# Allegro board ADU_TEST.brd
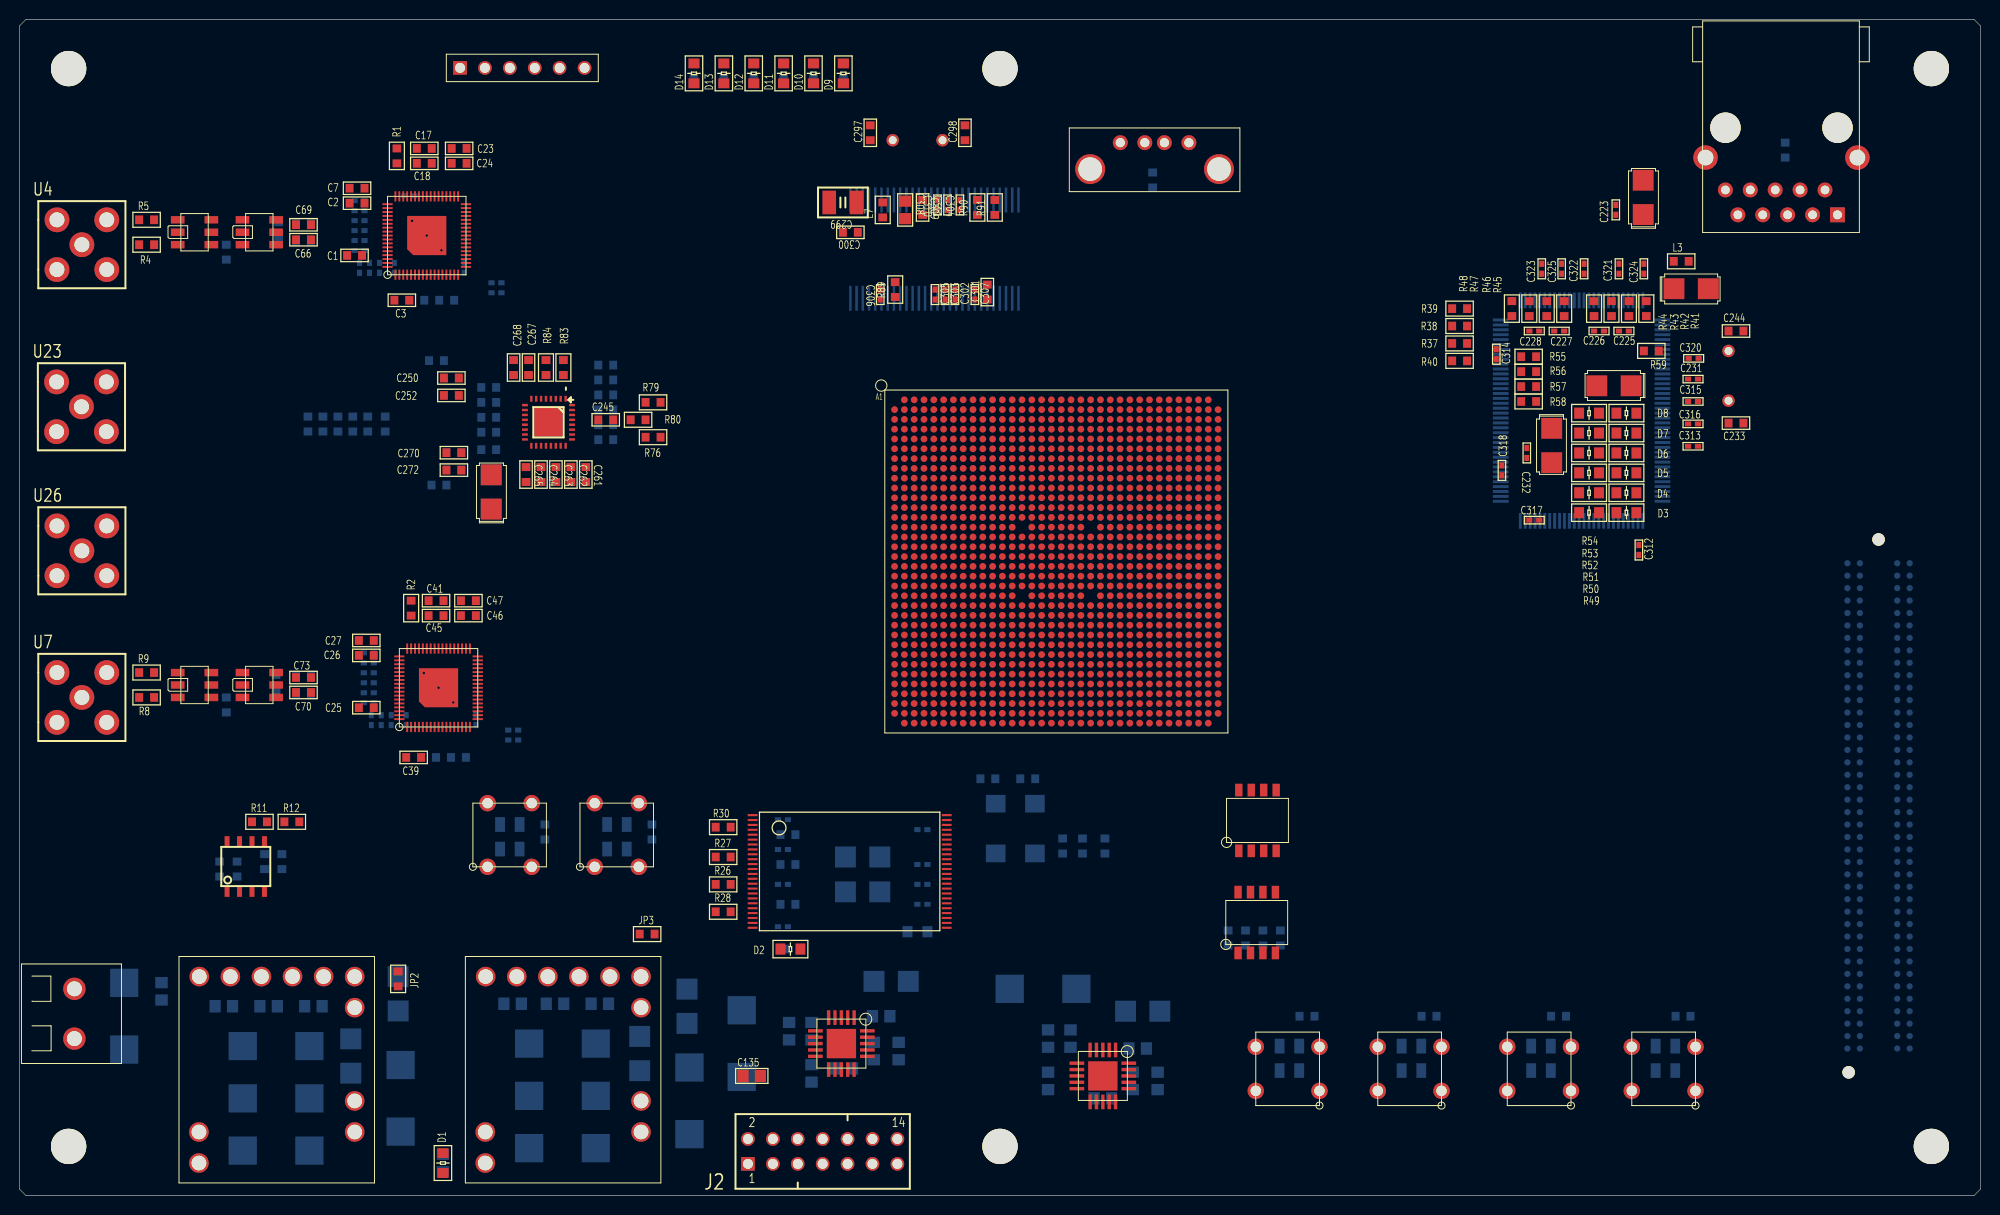
[diagram p0: board, top side]
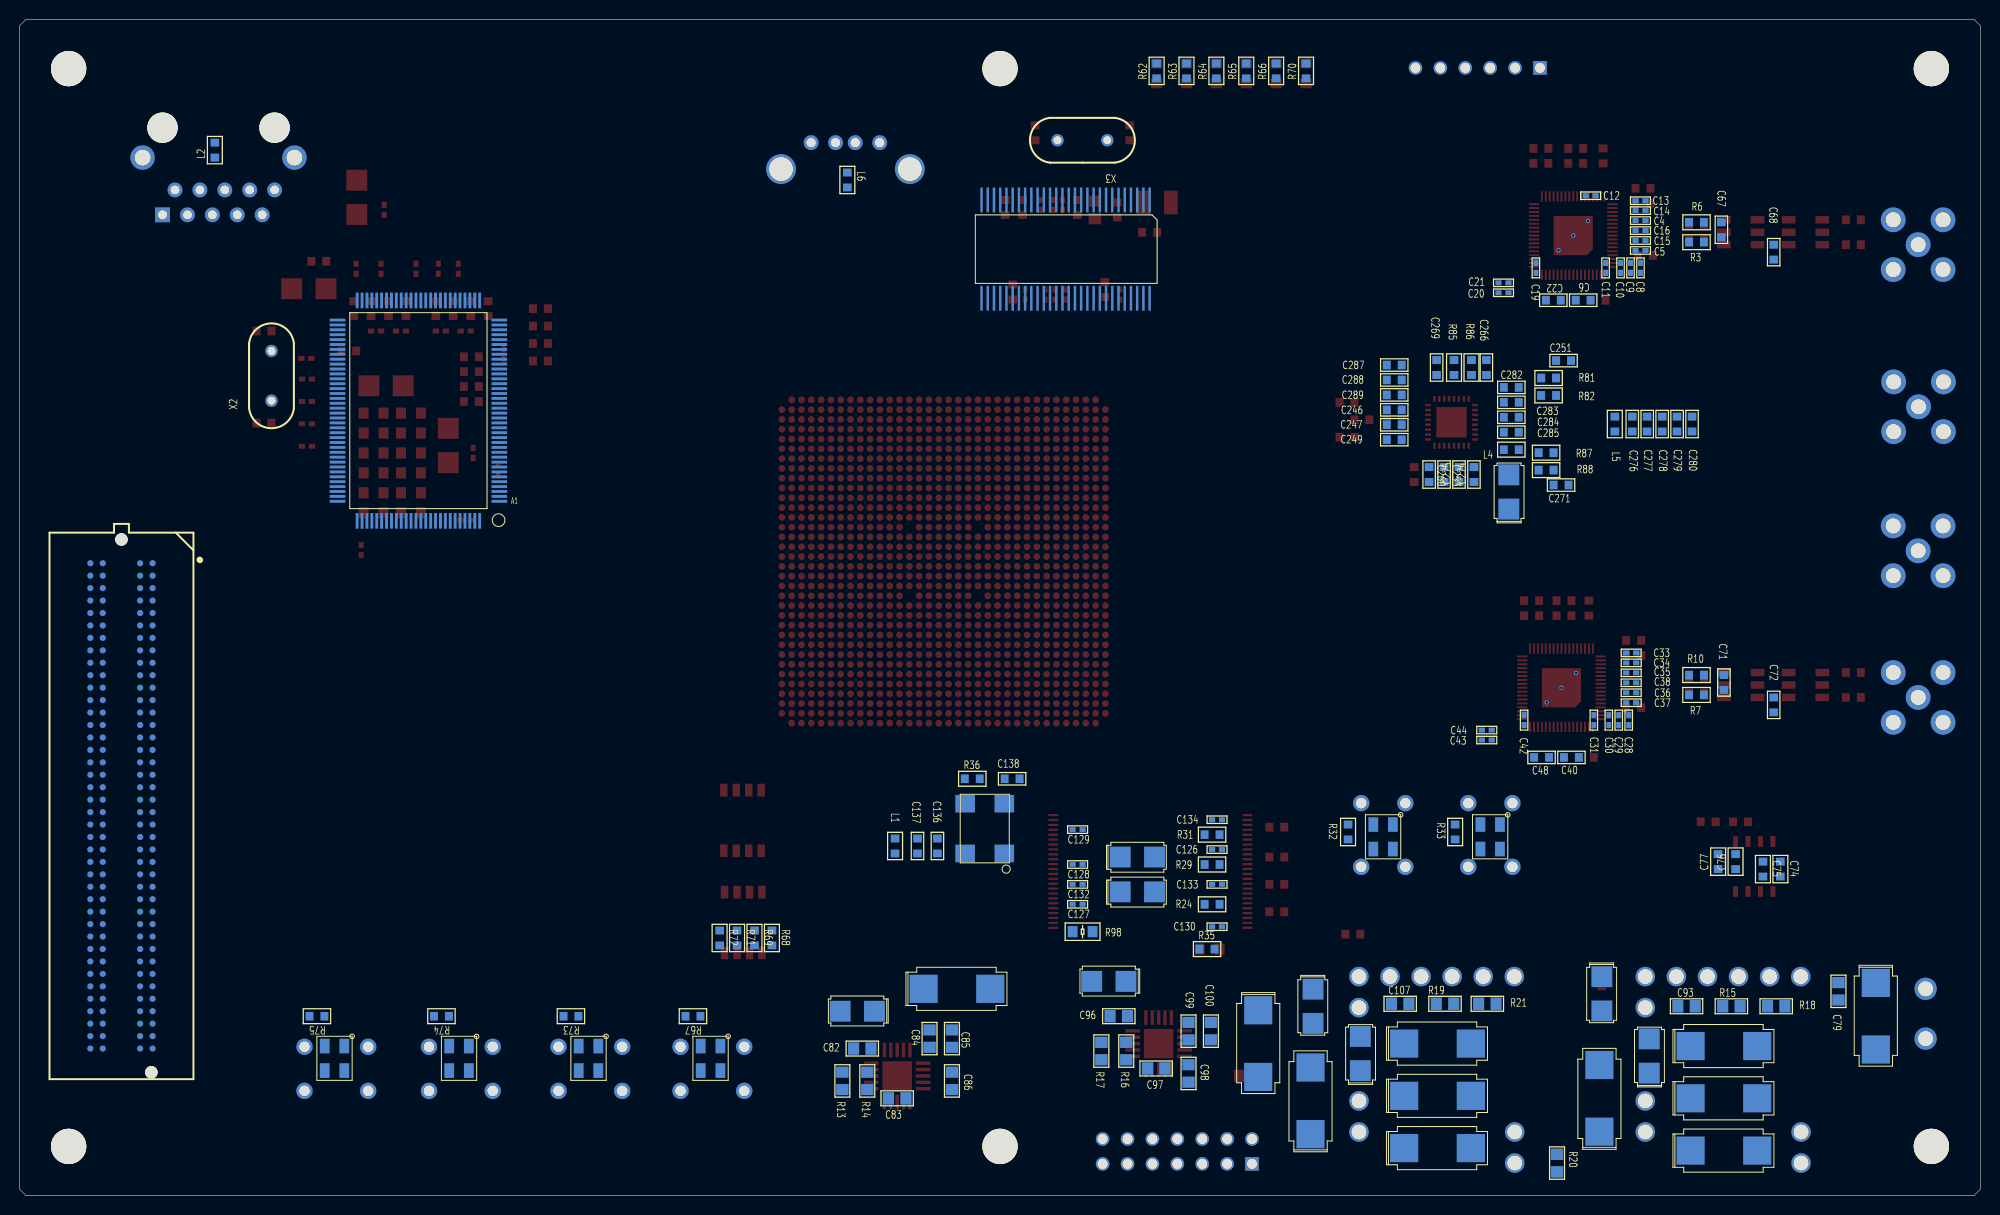
[diagram p1: board, bottom side, seen from below]

Outline 200 x 120 mm; copper layers: TOP, 2-PWR1, 3-GND1, 4-S1, 5-S2, 6-GND2, 7-S3, 8-S4, 9-GND3, 10-PWR2, 11-S5, BOTTOM. Coordinates in mm from the lower left corner of the outline.

## Design rules (mm)
net group ADC1_CLKIN: nets ADC1_CLKIN_N ADC1_CLKIN_P
net group ADC1_D0: nets ADC1_D0N ADC1_D0P
net group ADC1_D1: nets ADC1_D1N ADC1_D1P
net group ADC1_D2: nets ADC1_D2N ADC1_D2P
net group ADC1_D3: nets ADC1_D3N ADC1_D3P
net group ADC1_D4: nets ADC1_D4N ADC1_D4P
net group ADC1_D5: nets ADC1_D5N ADC1_D5P
net group ADC1_D6: nets ADC1_D6N ADC1_D6P
net group ADC1_D7: nets ADC1_D7N ADC1_D7P
net group ADC1_D8: nets ADC1_D8N ADC1_D8P
net group ADC1_D9: nets ADC1_D9N ADC1_D9P
net group ADC1_D10: nets ADC1_D10N ADC1_D10P
net group ADC1_D11: nets ADC1_D11N ADC1_D11P
net group ADC1_D12: nets ADC1_D12N ADC1_D12P
net group ADC1_D13: nets ADC1_D13N ADC1_D13P
net group ADC1_DCLK: nets ADC1_DCLKN ADC1_DCLKP
net group ADC1_IN: nets ADC1_INN ADC1_INP
net group ADC2_CLKIN: nets ADC2_CLKIN_N ADC2_CLKIN_P
net group ADC2_D0: nets ADC2_D0N ADC2_D0P
net group ADC2_D1: nets ADC2_D1N ADC2_D1P
net group ADC2_D2: nets ADC2_D2N ADC2_D2P
net group ADC2_D3: nets ADC2_D3N ADC2_D3P
net group ADC2_D4: nets ADC2_D4N ADC2_D4P
net group ADC2_D5: nets ADC2_D5N ADC2_D5P
net group ADC2_D6: nets ADC2_D6N ADC2_D6P
net group ADC2_D7: nets ADC2_D7N ADC2_D7P
net group ADC2_D8: nets ADC2_D8N ADC2_D8P
net group ADC2_D9: nets ADC2_D9N ADC2_D9P
net group ADC2_D10: nets ADC2_D10N ADC2_D10P
net group ADC2_D11: nets ADC2_D11N ADC2_D11P
net group ADC2_D12: nets ADC2_D12N ADC2_D12P
net group ADC2_D13: nets ADC2_D13N ADC2_D13P
net group ADC2_DCLK: nets ADC2_DCLKN ADC2_DCLKP
net group ADC2_IN: nets ADC2_INN ADC2_INP
net group CLK0_M2C: nets CLK0_M2C_N CLK0_M2C_P
net group CLK1_M2C: nets CLK1_M2C_N CLK1_M2C_P
net group DP0_C2M: nets DP0_C2M_N DP0_C2M_P
net group DP0_M2C: nets DP0_M2C_N DP0_M2C_P
net group GB_TCLK_M2C: nets GB_TCLK_M2C_N GB_TCLK_M2C_P
net group LA00_CC: nets LA00_CC_N LA00_CC_P
net group LA01_CC: nets LA01_CC_N LA01_CC_P
net group LA02: nets LA02_N LA02_P
net group LA03: nets LA03_N LA03_P
net group LA04: nets LA04_N LA04_P
net group LA05: nets LA05_N LA05_P
net group LA06: nets LA06_N LA06_P
net group LA07: nets LA07_N LA07_P
net group LA08: nets LA08_N LA08_P
net group LA09: nets LA09_N LA09_P
net group LA10: nets LA10_N LA10_P
net group LA11: nets LA11_N LA11_P
net group LA12: nets LA12_N LA12_P
net group LA13: nets LA13_N LA13_P
net group LA14: nets LA14_N LA14_P
net group LA15: nets LA15_N LA15_P
net group LA16: nets LA16_N LA16_P
net group LA17_CC: nets LA17_CC_N LA17_CC_P
net group LA18_CC: nets LA18_CC_N LA18_CC_P
net group LA19: nets LA19_N LA19_P
net group LA20: nets LA20_N LA20_P
net group LA21: nets LA21_N LA21_P
net group LA22: nets LA22_N LA22_P
net group LA23: nets LA23_N LA23_P
net group LA24: nets LA24_N LA24_P
net group LA25: nets LA25_N LA25_P
net group LA26: nets LA26_N LA26_P
net group LA27: nets LA27_N LA27_P
net group LA28: nets LA28_N LA28_P
net group LA29: nets LA29_N LA29_P
net group LA30: nets LA30_N LA30_P
net group LA31: nets LA31_N LA31_P
net group LA32: nets LA32_N LA32_P
net group LA33: nets LA33_N LA33_P
net group MDI0: nets MDI0_N MDI0_P
net group MDI1: nets MDI1_N MDI1_P
net group MDI2: nets MDI2_N MDI2_P
net group MDI3: nets MDI3_N MDI3_P
net group USB_D: nets USB_DN USB_DP
net group USB_XTAL: nets USB_XTALN USB_XTALP

## Placement (name value [footprint] x y rotation side)
C1  0.1U  [SC0603]  34.16 95.93 0 top
C2  0.01U  [SC0603]  34.42 101.26 0 top
C3  DNP  [SC0603]  38.99 91.36 180 top
C4  0.01U  [SC0402]  34.67 99.49 0 bottom
C5  0.01U  [SC0402]  34.67 96.44 0 bottom
C6  0.1U  [SC0603]  40.51 91.36 180 bottom
C7  0.1U  [SC0603]  34.42 102.79 0 top
C8  0.1U  [SC0402]  34.67 94.66 90 bottom
C9  0.01U  [SC0402]  35.69 94.66 90 bottom
C10  0.01U  [SC0402]  36.7 94.66 90 bottom
C11  10U  [SC0402]  38.23 94.66 270 bottom
C12  0.1U  [SC0402]  39.75 102.03 0 bottom
C13  0.01U  [SC0402]  34.67 101.52 0 bottom
C14  0.01U  [SC0402]  34.67 100.5 0 bottom
C15  0.01U  [SC0402]  34.67 97.45 0 bottom
C16  10U  [SC0402]  34.67 98.47 0 bottom
C17  0.01U  [SC0603]  41.28 106.85 180 top
C18  0.1U  [SC0603]  41.28 105.33 180 top
C19  0.1U  [SC0402]  45.34 94.66 90 bottom
C20  0.01U  [SC0402]  48.64 92.12 180 bottom
C21  0.01U  [SC0402]  48.64 93.14 180 bottom
C22  0.01U  [SC0603]  43.56 91.36 0 bottom
C23  0.1U  [SC0603]  44.83 106.85 0 top
C24  0.1U  [SC0603]  44.83 105.33 0 top
C25  0.1U  [SC0603]  35.36 49.78 0 top
C26  0.1U  [SC0603]  35.36 55.11 0 top
C27  0.01U  [SC0603]  35.36 56.63 0 top
C28  0.1U  [SC0402]  35.87 48.51 270 bottom
C29  0.01U  [SC0402]  36.89 48.51 270 bottom
C30  0.01U  [SC0402]  37.9 48.51 270 bottom
C31  10U  [SC0402]  39.43 48.51 270 bottom
C33  0.01U  [SC0402]  35.62 55.36 0 bottom
C34  0.01U  [SC0402]  35.62 54.35 0 bottom
C35  0.01U  [SC0402]  35.62 53.33 0 bottom
C36  0.01U  [SC0402]  35.62 51.3 0 bottom
C37  0.01U  [SC0402]  35.62 50.28 0 bottom
C38  10U  [SC0402]  35.62 52.32 0 bottom
C39  DNP  [SC0603]  40.19 44.7 180 top
C40  0.1U  [SC0603]  41.71 44.7 180 bottom
C41  0.01U  [SC0603]  42.48 60.7 180 top
C42  0.1U  [SC0402]  46.54 48.51 90 bottom
C43  0.01U  [SC0402]  50.35 46.47 180 bottom
C44  0.01U  [SC0402]  50.35 47.49 180 bottom
C45  0.1U  [SC0603]  42.48 59.17 180 top
C46  0.01U  [SC0603]  45.78 59.17 0 top
C47  0.1U  [SC0603]  45.78 60.7 0 top
C48  0.1U  [SC0603]  44.76 44.7 0 bottom
C66  1u  [SC0603]  28.96 97.54 0 top
C67  0.1u  [SC0603]  26.42 98.55 90 bottom
C68  0.1u  [SC0603]  21.08 96.27 270 bottom
C69  1u  [SC0603]  28.96 99.06 0 top
C70  1u  [SC0603]  28.96 51.33 0 top
C71  0.1u  [SC0603]  26.16 52.35 90 bottom
C72  0.1u  [SC0603]  21.08 50.06 270 bottom
C73  1u  [SC0603]  28.96 52.85 0 top
C74  10U  [SR0603]  20.4 33.3 270 bottom
C75  0.1U  [SR0603]  22.18 33.3 270 bottom
C76  1U  [SR0603]  24.97 34.06 90 bottom
C77  0.1U  [SR0603]  26.75 34.06 90 bottom
C78  1000u  [SC7343]  10.67 18.29 270 bottom
C79  0.1u  [SC0805]  14.48 20.83 90 bottom
C80  100u_NC  [SC7343]  104.39 21.08 180 bottom
C81  10u  [SC3528]  114.55 18.8 0 bottom
C82  0.1u  [SC0805]  114.05 14.99 180 bottom
C83  10n  [SC0805]  110.49 9.91 0 bottom
C84  1u  [SC0805]  107.19 16 270 bottom
C85  0.1u  [SC0805]  104.9 16 270 bottom
C86  0.1u  [SC0805]  104.9 11.68 90 bottom
C87  22u  [SC3528]  33.78 14.22 90 bottom
C88  470u_NC  [SC7343]  26.16 4.57 180 bottom
C89  330u  [SC7343]  38.86 9.91 90 bottom
C90  1000u_NC  [SC7343]  26.16 15.24 180 bottom
C91  470u  [SC7343]  26.16 9.91 180 bottom
C92  10u  [SC3528]  38.61 20.57 270 bottom
C93  0.1u  [SC0805]  29.97 19.3 0 bottom
C94  100u_NC  [SC7343]  73.66 15.49 270 bottom
C95  10u  [SC3528]  88.9 21.84 0 bottom
C96  0.1u  [SC0805]  87.88 18.29 180 bottom
C97  10n  [SC0805]  84.07 12.95 0 bottom
C98  0.1u  [SC0805]  80.77 12.45 90 bottom
C99  1u  [SC0805]  80.77 16.76 270 bottom
C100  0.1u  [SC0805]  78.49 16.76 270 bottom
C101  22u  [SC3528]  63.25 14.48 90 bottom
C102  470u_NC  [SC7343]  55.37 4.83 180 bottom
C103  330u  [SC7343]  68.33 9.65 90 bottom
C104  1000u_NC  [SC7343]  55.37 15.49 180 bottom
C105  470u  [SC7343]  55.37 10.16 180 bottom
C106  10u  [SC3528]  68.07 19.3 270 bottom
C107  0.1u  [SC0805]  59.18 19.56 0 bottom
C125  10u  [SC3528]  85.99 34.54 180 bottom
C126  0.1u  [SC0402]  77.86 35.3 0 bottom
C127  0.1u  [SC0402]  92.08 29.71 180 bottom
C128  0.1u  [SC0402]  92.08 33.77 180 bottom
C129  0.1u  [SC0402]  92.08 37.33 180 bottom
C130  0.1u  [SC0402]  77.86 27.42 0 bottom
C131  10u  [SC3528]  85.99 30.98 180 bottom
C132  0.1u  [SC0402]  92.08 31.74 180 bottom
C133  0.1u  [SC0402]  77.86 31.74 0 bottom
C134  0.1u  [SC0402]  77.86 38.35 0 bottom
C135  1u  [SC0805]  74.68 12.19 180 top
C136  0.1u  [SC0603]  106.38 35.66 90 bottom
C137  1u  [SC0603]  108.42 35.66 90 bottom
C138  33p  [SC0603]  98.76 42.52 180 bottom
C223  10n  [SC0402]  162.81 100.58 90 top
C224  10u  [SC3528]  165.61 101.85 90 top
C225  10n  [SC0402]  163.64 88.22 180 top
C226  10n  [SC0402]  161.1 88.22 0 top
C227  10n  [SC0402]  157.04 88.22 180 top
C228  10n  [SC0402]  154.5 88.22 0 top
C229  10u  [SC3528]  170.5 92.54 0 top
C230  10u  [SC3528]  156.28 76.53 270 top
C231  0.1u  [SC0402]  170.69 83.31 0 top
C232  0.1u  [SC0402]  153.74 75.77 270 top
C233  22p  [SC0603]  175.07 78.82 180 top
C244  22p  [SC0603]  175.07 88.22 180 top
C245  0.1U  [SC0603]  59.78 79.16 180 top
C246  100p  [SC0603]  59.78 80.17 0 bottom
C247  100p  [SC0603]  59.78 78.65 180 bottom
C249  DNP  [SC0603]  59.78 77.13 0 bottom
C250  100p  [SC0603]  44.04 83.42 0 top
C251  100p  [SC0603]  42.52 85.2 0 bottom
C252  100p  [SC0603]  44.04 81.64 0 top
C253  10U  [SC0603]  54.7 73.57 270 bottom
C260  22U  [SC0603]  56.23 73.57 270 bottom
C261  10U  [SC0603]  57.75 73.57 270 top
C262  22U  [SC0603]  56.23 73.57 270 top
C263  2.2U  [SC0603]  54.7 73.57 270 top
C264  3.3n  [SC0603]  53.18 73.57 270 top
C265  2.2U  [SC0603]  51.66 73.57 270 top
C266  39p  [SC0603]  50.39 84.49 90 bottom
C267  3.9n  [SC0603]  51.91 84.49 90 top
C268  100p  [SC0603]  50.39 84.49 270 top
C269  4.7p  [SC0603]  55.47 84.49 90 bottom
C270  100p  [SC0603]  44.3 75.8 0 top
C271  100p  [SC0603]  42.77 72.5 0 bottom
C272  100p  [SC0603]  44.3 74.02 0 top
C274  100p  [SC0603]  51.66 73.57 90 bottom
C275  100p  [SC0603]  53.18 73.57 90 bottom
C276  0.1U  [SC0603]  35.51 78.72 90 bottom
C277  0.01U  [SC0603]  33.99 78.72 90 bottom
C278  1U  [SC0603]  32.46 78.72 90 bottom
C279  10U  [SC0603]  30.94 78.72 90 bottom
C280  0.1U  [SC0603]  29.41 78.72 90 bottom
C281  10u  [SC3528]  48.1 71.79 90 bottom
C282  0.1U  [SC0603]  47.85 82.46 180 bottom
C283  0.01U  [SC0603]  47.85 80.94 180 bottom
C284  100p  [SC0603]  47.85 79.41 180 bottom
C285  0.1U  [SC0603]  47.85 77.89 180 bottom
C286  10u  [SC3528]  48.1 71.79 90 top
C287  1U  [SC0603]  59.78 84.75 180 bottom
C288  0.1U  [SC0603]  59.78 83.22 180 bottom
C289  0.01U  [SC0603]  59.78 81.7 180 bottom
C297  12p  [SC0603]  86.77 108.45 90 top
C298  12p  [SC0603]  96.42 108.45 90 top
C299  47U  [SC1210]  83.98 101.34 180 top
C300  1u  [SC0603]  84.74 98.29 180 top
C301  1u  [SC0603]  98.71 92.19 90 top
C302  0.1u  [SC0402]  95.41 91.94 90 top
C303  0.1u  [SC0402]  94.39 91.94 90 top
C304  0.1u  [SC0402]  95.91 101.08 270 top
C305  0.1u  [SC0402]  93.37 91.94 90 top
C306  0.1u  [SC0402]  87.79 91.94 270 top
C307  0.1u  [SC0402]  97.44 91.94 90 top
C308  10U  [SC0805]  90.33 100.58 270 top
C309  1u  [SC0603]  92.1 100.83 270 top
C310  0.1u  [SC0402]  93.63 101.08 270 top
C311  0.1u  [SC0402]  94.64 101.08 270 top
C312  0.1u  [SC0402]  165.17 65.87 90 top
C313  0.1u  [SC0402]  170.69 76.45 180 top
C314  0.1u  [SC0402]  150.62 85.85 90 top
C315  0.1u  [SC0402]  170.69 81.03 180 top
C316  0.1u  [SC0402]  170.69 78.74 180 top
C317  0.1u  [SC0402]  154.5 68.91 180 top
C318  0.1u  [SC0402]  151.2 73.99 90 top
C319  10u  [SC3528]  162.63 82.63 180 top
C320  0.1u  [SC0402]  170.75 85.42 180 top
C321  0.1u  [SC0402]  163.13 94.57 270 top
C322  0.1u  [SC0402]  159.58 94.57 270 top
C323  0.1u  [SC0402]  155.26 94.57 270 top
C324  0.1u  [SC0402]  165.67 94.57 270 top
C325  0.1u  [SC0402]  157.29 94.57 270 top
D1  LED  [SR0805]  43.18 3.3 270 top
D2  LED  [SR0805]  78.62 25.14 0 top
D3  LED  [SR0805]  163.9 69.68 180 top
D4  LED  [SR0805]  163.9 71.71 180 top
D5  LED  [SR0805]  163.9 73.74 180 top
D6  LED  [SR0805]  163.9 75.77 180 top
D7  LED  [SR0805]  163.9 77.8 180 top
D8  LED  [SR0805]  163.9 79.84 180 top
D9  LED  [SR0805]  84.03 114.51 90 top
D10  LED  [SR0805]  80.98 114.51 90 top
D11  LED  [SR0805]  77.93 114.51 90 top
D12  LED  [SR0805]  74.88 114.51 90 top
D13  LED  [SR0805]  71.83 114.51 90 top
D14  LED  [SR0805]  68.79 114.51 90 top
J1  pwr  [PW_2P]  5.59 21.08 270 top
J2  JTAG  [HEAD-14P]  81.91 4.49 0 top
JP2  0  [SR0603]  38.61 22.1 270 top
JP3  0  [SR0603]  64.01 26.67 0 top
L1  220@100M  [SR0603]  110.7 35.66 270 bottom
L2  220@100M  [SR0603]  180.09 106.68 90 bottom
L3  220@100M  [SR0603]  169.48 95.33 0 top
L4  220@100M  [SR0603]  47.85 76.11 180 bottom
L5  220@100M  [SR0603]  37.29 78.72 270 bottom
L6  220@100M  [SR0603]  115.57 103.63 270 bottom
L7  220@100M  [SR0603]  88.04 100.58 90 top
NOREF  -  [unnamed]  0 0 0 top
R1  1k  [SR0603]  38.48 106.09 90 top
R2  1k  [SR0603]  39.94 59.94 90 top
R3  50  [SR0603]  28.96 97.28 180 bottom
R4  0  [SR0603]  12.95 97.03 0 top
R5  0  [SR0603]  12.95 99.57 0 top
R6  50  [SR0603]  28.96 99.31 0 bottom
R7  50  [SR0603]  28.96 51.08 180 bottom
R8  0  [SR0603]  12.95 50.82 0 top
R9  0  [SR0603]  12.95 53.36 0 top
R10  50  [SR0603]  28.96 53.11 0 bottom
R11  82  [SR0603]  24.47 38.13 0 top
R12  1K05  [SR0603]  27.77 38.13 0 top
R13  5.1K  [SC0805]  116.08 11.68 90 bottom
R14  2.4K  [SC0805]  113.54 11.68 90 bottom
R15  0  [SC0805]  25.4 19.3 0 bottom
R16  3K  [SC0805]  87.12 14.73 90 bottom
R17  2.4K  [SC0805]  89.66 14.73 90 bottom
R18  12.1K  [SC0805]  20.83 19.3 180 bottom
R19  0  [SC0805]  54.61 19.56 0 bottom
R20  430  [SC0805]  43.18 3.3 90 bottom
R21  1.21K  [SC0805]  50.29 19.56 180 bottom
R24  4.7K  [SR0603]  78.37 29.71 180 bottom
R26  100  [SR0603]  71.76 31.74 0 top
R27  100  [SR0603]  71.76 34.54 0 top
R28  0  [SR0603]  71.76 28.95 0 top
R29  4.7K  [SR0603]  78.37 33.77 0 bottom
R30  0  [SR0603]  71.76 37.58 0 top
R31  4.7K  [SR0603]  78.37 36.82 0 bottom
R32  100  [SR0603]  64.5 37.09 90 bottom
R33  1k  [SR0603]  53.58 37.09 90 bottom
R35  470  [SR0603]  78.88 25.14 180 bottom
R36  33  [SR0603]  102.83 42.52 180 bottom
R37  4.7K  [SR0603]  146.88 86.95 0 top
R38  1k  [SR0603]  146.88 88.73 0 top
R39  4.99K  [SR0603]  146.88 90.5 0 top
R40  4.7K  [SR0603]  146.88 85.17 0 top
R41  47R  [SR0603]  165.93 90.5 270 top
R42  47R  [SR0603]  164.15 90.5 270 top
R43  47R  [SR0603]  162.37 90.5 270 top
R44  47R  [SR0603]  160.59 90.5 270 top
R45  47R  [SR0603]  157.55 90.5 270 top
R46  47R  [SR0603]  155.77 90.5 270 top
R47  47R  [SR0603]  153.99 90.5 270 top
R48  47R  [SR0603]  152.21 90.5 270 top
R49  150  [SR0805]  160.09 69.68 180 top
R50  150  [SR0805]  160.09 71.71 180 top
R51  150  [SR0805]  160.09 73.74 180 top
R52  150  [SR0805]  160.09 75.77 180 top
R53  150  [SR0805]  160.09 77.8 180 top
R54  150  [SR0805]  160.09 79.84 180 top
R55  4.7K  [SR0603]  153.92 85.6 180 top
R56  4.7K  [SR0603]  153.92 84.07 180 top
R57  4.7K  [SR0603]  153.92 82.55 180 top
R58  4.7K  [SR0603]  153.92 81.03 180 top
R59  1k  [SR0603]  166.44 86.19 0 top
R62  300  [SR0603]  84.03 114.77 90 bottom
R63  300  [SR0603]  80.98 114.77 90 bottom
R64  300  [SR0603]  77.93 114.77 90 bottom
R65  300  [SR0603]  74.88 114.77 90 bottom
R66  300  [SR0603]  71.83 114.77 90 bottom
R67  1k  [SR0603]  131.32 18.29 0 bottom
R68  4.7K  [SR0603]  123.26 26.27 270 bottom
R69  4.7K  [SR0603]  125.04 26.27 270 bottom
R70  300  [SR0603]  68.79 114.77 90 bottom
R71  4.7K  [SR0603]  126.82 26.27 270 bottom
R72  4.7K  [SR0603]  128.6 26.27 270 bottom
R73  1k  [SR0603]  143.76 18.29 0 bottom
R74  1k  [SR0603]  156.97 18.29 0 bottom
R75  1k  [SR0603]  169.67 18.29 0 bottom
R76  18  [SR0603]  64.61 77.38 0 top
R79  47  [SR0603]  64.61 80.94 180 top
R80  33  [SR0603]  63.09 79.16 180 top
R81  50  [SR0603]  44.04 83.42 180 bottom
R82  50  [SR0603]  44.04 81.64 0 bottom
R83  820  [SR0603]  55.47 84.49 270 top
R84  DNP  [SR0603]  53.69 84.49 270 top
R85  0  [SR0603]  53.69 84.49 90 bottom
R86  6.8k  [SR0603]  51.91 84.49 270 bottom
R87  50  [SR0603]  44.3 75.8 180 bottom
R88  50  [SR0603]  44.3 74.02 0 bottom
R89  100K  [SR0603]  89.31 92.45 90 top
R90  1k  [SR0603]  97.69 100.83 90 top
R91  1k  [SR0603]  99.47 100.83 90 top
R98  4.7K  [SR0805]  91.58 26.92 0 bottom
S1  SW  [RST_4P]  47.73 33.53 0 top
S2  SW  [RST_4P]  132.59 10.67 90 top
S3  SW  [RST_4P]  145.03 10.67 90 top
S4  SW  [RST_4P]  158.24 10.67 90 top
S5  SW  [RST_4P]  170.94 10.67 90 top
SW1  SW DIP-4/SM  [DIP8]  124.28 24.75 0 top
SW2  SW DIP-4/SM  [DIP8]  124.36 35.17 0 top
SYS_RST1  SW  [RST_4P]  58.66 33.53 0 top
U1  TsingADC  [QFN68_69]  41.53 97.96 180 top
U2  TsingADC  [QFN68_69]  42.73 51.81 180 top
U3  JFM4VSX55  [BGA1148-3434]  105.75 64.7 0 top
U4  sma  [CON-BNC-S-T]  6.35 97.03 0 top
U5  balan  [ETC1-1-13TR]  19.56 99.57 270 top
U6  balan  [ETC1-1-13TR]  26.16 99.57 270 top
U7  sma  [CON-BNC-S-T]  6.35 50.82 0 top
U8  balan  [ETC1-1-13TR]  19.56 53.36 270 top
U9  balan  [ETC1-1-13TR]  26.16 53.36 270 top
U10  REF192  [AD8014]  21.16 31.02 0 top
U11  TPS74401  [QFN_20]  110.49 12.19 0 top
U12  PTH08T221W  [PTH08221W]  18.29 3.3 0 top
U13  TPS74401  [QFN_20]  83.82 15.49 0 top
U14  PTH08T221W  [PTH08221W]  47.5 3.3 0 top
U15  FMC_LPC_IO  [ASP_134604_01]  192.79 64.52 90 bottom
U16  xcf32p  [TSOP48]  84.46 33.01 0 top
U17  cat811  [CAT811]  59.93 37.85 90 bottom
U18  cat811  [CAT811]  49 37.85 90 bottom
U19  88E1111  [PQFP_128]  159.32 80.09 180 bottom
U20  RJ45  [RJ45_HALO]  185.42 100.08 180 top
U21  -  [CAT811]  128.52 15.24 90 bottom
U22  -  [CAT811]  140.97 15.24 90 bottom
U23  sma  [CON-BNC-S-T]  6.31 80.49 0 top
U24  -  [CAT811]  154.18 15.24 90 bottom
U25  -  [CAT811]  166.88 15.24 90 bottom
U26  sma  [CON-BNC-S-T]  6.35 65.79 0 top
U27  header1x6  [HEAD1X6]  44.92 115.07 0 top
U28  -  [LMX2581]  53.94 78.9 0 top
U29  -  [USBSKT]  112.27 107.44 0 top
U30  -  [CY7C68013]  84.74 101.59 270 bottom
X1  TCXO 100MHz  [XO75]  101.56 37.44 90 bottom
X2  25M  [XTAL2-200A]  174.31 83.65 90 bottom
X3  24M  [XTAL2-200A]  91.6 107.69 0 bottom

## Library data of the parts
C1-C31 C33-C48 C74-C77 C224 C229 C230 C245-C247 C249-C253 C260-C272 C274-C289 = C
C66-C73 C79 C82-C86 C93 C96-C100 C107 C126-C130 C132-C138 C223 C225-C228 C231-C233 C244 C297-C318 C320-C325 = CAP NP
C78 C80 C81 C87-C92 C94 C95 C101-C106 C125 C131 C319 = CAP
D1 = 1N6265/TO_0
D2-D14 = LED
J1 = pwr
J2 = JTAG
JP2 JP3 R1-R21 R24 R26-R33 R35-R59 R62-R76 R79-R91 R98 = R
L1-L3 L6 L7 = INDUCTOR
L4 L5 = L
S1-S5 SYS_RST1 = SW_0
SW1 SW2 = SW DIP-4/SM
U1 U2 = TsingADC
U3 = JFM4VSX55
U4 U7 U23 U26 = sma_edge
U5 U6 U8 U9 = balan
U10 = REF192
U11 U13 = TPS74401_3
U12 U14 = PTH08T240_0
U15 = FMC_LPC_IO
U16 = xcf32p
U17 U18 = cat811
U19 = 88E1111
U20 = RJ45
U21 U22 U24 U25 = CRYSTAL_0
U27 = header1x6
U28 = LMX2581
U29 = USBSKT
U30 = CY7C68013
X1 = TCXO 100MHz
X2 X3 = 25M

## Footprints (pads in the part's own frame, mm; a bottom-side part is the same pattern mirrored in y, then rotated)
AD8014
  rect 0.51x1.1 smd: 1(0,0) 2(1.27,0) 3(2.54,0) 4(3.81,0) 5(3.81,5.1) 6(2.54,5.1) 7(1.27,5.1) 8(0,5.1)
ASP_134604_01
  round 1.27 hole 1.27 unplated: (-51.956,-6.225) (2.424,-3.175)
  round 0.64 smd: C1(0,0) C2(-1.27,0) C3(-2.54,0) C4(-3.81,0) C5(-5.08,0) C6(-6.35,0) C7(-7.62,0) C8(-8.89,0) C9(-10.16,0) C10(-11.43,0) C11(-12.7,0) C12(-13.97,0) C13(-15.24,0) C14(-16.51,0) C15(-17.78,0) C16(-19.05,0) C17(-20.32,0) C18(-21.59,0) C19(-22.86,0) C20(-24.13,0) C21(-25.4,0) C22(-26.67,0) C23(-27.94,0) C24(-29.21,0) C25(-30.48,0) C26(-31.75,0) C27(-33.02,0) C28(-34.29,0) C29(-35.56,0) C30(-36.83,0) C31(-38.1,0) C32(-39.37,0) C33(-40.64,0) C34(-41.91,0) C35(-43.18,0) C36(-44.45,0) C37(-45.72,0) C38(-46.99,0) C39(-48.26,0) C40(-49.53,0) D1(0,-1.27) D2(-1.27,-1.27) D3(-2.54,-1.27) D4(-3.81,-1.27) D5(-5.08,-1.27) D6(-6.35,-1.27) D7(-7.62,-1.27) D8(-8.89,-1.27) D9(-10.16,-1.27) D10(-11.43,-1.27) D11(-12.7,-1.27) D12(-13.97,-1.27) D13(-15.24,-1.27) D14(-16.51,-1.27) D15(-17.78,-1.27) D16(-19.05,-1.27) D17(-20.32,-1.27) D18(-21.59,-1.27) D19(-22.86,-1.27) D20(-24.13,-1.27) D21(-25.4,-1.27) D22(-26.67,-1.27) D23(-27.94,-1.27) D24(-29.21,-1.27) D25(-30.48,-1.27) D26(-31.75,-1.27) D27(-33.02,-1.27) D28(-34.29,-1.27) D29(-35.56,-1.27) D30(-36.83,-1.27) D31(-38.1,-1.27) D32(-39.37,-1.27) D33(-40.64,-1.27) D34(-41.91,-1.27) D35(-43.18,-1.27) D36(-44.45,-1.27) D37(-45.72,-1.27) D38(-46.99,-1.27) D39(-48.26,-1.27) D40(-49.53,-1.27) G1(0,-5.08) G2(-1.27,-5.08) G3(-2.54,-5.08) G4(-3.81,-5.08) G5(-5.08,-5.08) G6(-6.35,-5.08) G7(-7.62,-5.08) G8(-8.89,-5.08) G9(-10.16,-5.08) G10(-11.43,-5.08) G11(-12.7,-5.08) G12(-13.97,-5.08) G13(-15.24,-5.08) G14(-16.51,-5.08) G15(-17.78,-5.08) G16(-19.05,-5.08) G17(-20.32,-5.08) G18(-21.59,-5.08) G19(-22.86,-5.08) G20(-24.13,-5.08) G21(-25.4,-5.08) G22(-26.67,-5.08) G23(-27.94,-5.08) G24(-29.21,-5.08) G25(-30.48,-5.08) G26(-31.75,-5.08) G27(-33.02,-5.08) G28(-34.29,-5.08) G29(-35.56,-5.08) G30(-36.83,-5.08) G31(-38.1,-5.08) G32(-39.37,-5.08) G33(-40.64,-5.08) G34(-41.91,-5.08) G35(-43.18,-5.08) G36(-44.45,-5.08) G37(-45.72,-5.08) G38(-46.99,-5.08) G39(-48.26,-5.08) G40(-49.53,-5.08) H1(0,-6.35) H2(-1.27,-6.35) H3(-2.54,-6.35) H4(-3.81,-6.35) H5(-5.08,-6.35) H6(-6.35,-6.35) H7(-7.62,-6.35) H8(-8.89,-6.35) H9(-10.16,-6.35) H10(-11.43,-6.35) H11(-12.7,-6.35) H12(-13.97,-6.35) H13(-15.24,-6.35) H14(-16.51,-6.35) H15(-17.78,-6.35) H16(-19.05,-6.35) H17(-20.32,-6.35) H18(-21.59,-6.35) H19(-22.86,-6.35) H20(-24.13,-6.35) H21(-25.4,-6.35) H22(-26.67,-6.35) H23(-27.94,-6.35) H24(-29.21,-6.35) H25(-30.48,-6.35) H26(-31.75,-6.35) H27(-33.02,-6.35) H28(-34.29,-6.35) H29(-35.56,-6.35) H30(-36.83,-6.35) H31(-38.1,-6.35) H32(-39.37,-6.35) H33(-40.64,-6.35) H34(-41.91,-6.35) H35(-43.18,-6.35) H36(-44.45,-6.35) H37(-45.72,-6.35) H38(-46.99,-6.35) H39(-48.26,-6.35) H40(-49.53,-6.35)
BGA1148-3434
  round 0.7 smd: A2(-15.5,16.5) A3(-14.5,16.5) A4(-13.5,16.5) A5(-12.5,16.5) A6(-11.5,16.5) A7(-10.5,16.5) A8(-9.5,16.5) A9(-8.5,16.5) A10(-7.5,16.5) A11(-6.5,16.5) A12(-5.5,16.5) A13(-4.5,16.5) A14(-3.5,16.5) A15(-2.5,16.5) A16(-1.5,16.5) A17(-0.5,16.5) A18(0.5,16.5) A19(1.5,16.5) A20(2.5,16.5) A21(3.5,16.5) A22(4.5,16.5) A23(5.5,16.5) A24(6.5,16.5) A25(7.5,16.5) A26(8.5,16.5) A27(9.5,16.5) A28(10.5,16.5) A29(11.5,16.5) A30(12.5,16.5) A31(13.5,16.5) A32(14.5,16.5) A33(15.5,16.5) AA1(-16.5,-3.5) AA2(-15.5,-3.5) AA3(-14.5,-3.5) AA4(-13.5,-3.5) AA5(-12.5,-3.5) AA6(-11.5,-3.5) AA7(-10.5,-3.5) AA8(-9.5,-3.5) AA9(-8.5,-3.5) AA10(-7.5,-3.5) AA11(-6.5,-3.5) AA12(-5.5,-3.5) AA13(-4.5,-3.5) AA15(-2.5,-3.5) AA16(-1.5,-3.5) AA17(-0.5,-3.5) AA18(0.5,-3.5) AA19(1.5,-3.5) AA20(2.5,-3.5) AA22(4.5,-3.5) AA23(5.5,-3.5) AA24(6.5,-3.5) AA25(7.5,-3.5) AA26(8.5,-3.5) AA27(9.5,-3.5) AA28(10.5,-3.5) AA29(11.5,-3.5) AA30(12.5,-3.5) AA31(13.5,-3.5) AA32(14.5,-3.5) AA33(15.5,-3.5) AA34(16.5,-3.5) AB1(-16.5,-4.5) AB2(-15.5,-4.5) AB3(-14.5,-4.5) AB4(-13.5,-4.5) AB5(-12.5,-4.5) AB6(-11.5,-4.5) AB7(-10.5,-4.5) AB8(-9.5,-4.5) AB9(-8.5,-4.5) AB10(-7.5,-4.5) AB11(-6.5,-4.5) AB12(-5.5,-4.5) AB13(-4.5,-4.5) AB14(-3.5,-4.5) AB15(-2.5,-4.5) AB16(-1.5,-4.5) AB17(-0.5,-4.5) AB18(0.5,-4.5) AB19(1.5,-4.5) AB20(2.5,-4.5) AB21(3.5,-4.5) AB22(4.5,-4.5) AB23(5.5,-4.5) AB24(6.5,-4.5) AB25(7.5,-4.5) AB26(8.5,-4.5) AB27(9.5,-4.5) AB28(10.5,-4.5) AB29(11.5,-4.5) AB30(12.5,-4.5) AB31(13.5,-4.5) AB32(14.5,-4.5) AB33(15.5,-4.5) AB34(16.5,-4.5) AC1(-16.5,-5.5) AC2(-15.5,-5.5) AC3(-14.5,-5.5) AC4(-13.5,-5.5) AC5(-12.5,-5.5) AC6(-11.5,-5.5) AC7(-10.5,-5.5) AC8(-9.5,-5.5) AC9(-8.5,-5.5) AC10(-7.5,-5.5) AC11(-6.5,-5.5) AC12(-5.5,-5.5) AC13(-4.5,-5.5) AC14(-3.5,-5.5) AC15(-2.5,-5.5) AC16(-1.5,-5.5) AC17(-0.5,-5.5) AC18(0.5,-5.5) AC19(1.5,-5.5) AC20(2.5,-5.5) AC21(3.5,-5.5) AC22(4.5,-5.5) AC23(5.5,-5.5) AC24(6.5,-5.5) AC25(7.5,-5.5) AC26(8.5,-5.5) AC27(9.5,-5.5) AC28(10.5,-5.5) AC29(11.5,-5.5) AC30(12.5,-5.5) AC31(13.5,-5.5) AC32(14.5,-5.5) AC33(15.5,-5.5) AC34(16.5,-5.5) AD1(-16.5,-6.5) AD2(-15.5,-6.5) AD3(-14.5,-6.5) AD4(-13.5,-6.5) AD5(-12.5,-6.5) AD6(-11.5,-6.5) AD7(-10.5,-6.5) AD8(-9.5,-6.5) AD9(-8.5,-6.5) AD10(-7.5,-6.5) AD11(-6.5,-6.5) AD12(-5.5,-6.5) AD13(-4.5,-6.5) AD14(-3.5,-6.5) AD15(-2.5,-6.5) AD16(-1.5,-6.5) AD17(-0.5,-6.5) AD18(0.5,-6.5) AD19(1.5,-6.5) AD20(2.5,-6.5) AD21(3.5,-6.5) AD22(4.5,-6.5) AD23(5.5,-6.5) AD24(6.5,-6.5) AD25(7.5,-6.5) AD26(8.5,-6.5) AD27(9.5,-6.5) AD28(10.5,-6.5) AD29(11.5,-6.5) AD30(12.5,-6.5) AD31(13.5,-6.5) AD32(14.5,-6.5) AD33(15.5,-6.5) AD34(16.5,-6.5) AE1(-16.5,-7.5) AE2(-15.5,-7.5) AE3(-14.5,-7.5) AE4(-13.5,-7.5) AE5(-12.5,-7.5) AE6(-11.5,-7.5) AE7(-10.5,-7.5) AE8(-9.5,-7.5) AE9(-8.5,-7.5) AE10(-7.5,-7.5) AE11(-6.5,-7.5) AE12(-5.5,-7.5) AE13(-4.5,-7.5) AE14(-3.5,-7.5) AE15(-2.5,-7.5) AE16(-1.5,-7.5) AE17(-0.5,-7.5) AE18(0.5,-7.5) AE19(1.5,-7.5) AE20(2.5,-7.5) AE21(3.5,-7.5) AE22(4.5,-7.5) AE23(5.5,-7.5) AE24(6.5,-7.5) AE25(7.5,-7.5) AE26(8.5,-7.5) AE27(9.5,-7.5) AE28(10.5,-7.5) AE29(11.5,-7.5) AE30(12.5,-7.5) AE31(13.5,-7.5) AE32(14.5,-7.5) AE33(15.5,-7.5) AE34(16.5,-7.5) AF1(-16.5,-8.5) AF2(-15.5,-8.5) AF3(-14.5,-8.5) AF4(-13.5,-8.5) AF5(-12.5,-8.5) AF6(-11.5,-8.5) AF7(-10.5,-8.5) AF8(-9.5,-8.5) AF9(-8.5,-8.5) AF10(-7.5,-8.5) AF11(-6.5,-8.5) AF12(-5.5,-8.5) AF13(-4.5,-8.5) AF14(-3.5,-8.5) AF15(-2.5,-8.5) AF16(-1.5,-8.5) AF17(-0.5,-8.5) AF18(0.5,-8.5) AF19(1.5,-8.5) AF20(2.5,-8.5) AF21(3.5,-8.5) AF22(4.5,-8.5) AF23(5.5,-8.5) AF24(6.5,-8.5) AF25(7.5,-8.5) AF26(8.5,-8.5) AF27(9.5,-8.5) AF28(10.5,-8.5) AF29(11.5,-8.5) AF30(12.5,-8.5) AF31(13.5,-8.5) AF32(14.5,-8.5) AF33(15.5,-8.5) AF34(16.5,-8.5) AG1(-16.5,-9.5) AG2(-15.5,-9.5) AG3(-14.5,-9.5) AG4(-13.5,-9.5) AG5(-12.5,-9.5) AG6(-11.5,-9.5) AG7(-10.5,-9.5) AG8(-9.5,-9.5) AG9(-8.5,-9.5) AG10(-7.5,-9.5) AG11(-6.5,-9.5) AG12(-5.5,-9.5) AG13(-4.5,-9.5) AG14(-3.5,-9.5) AG15(-2.5,-9.5) AG16(-1.5,-9.5) AG17(-0.5,-9.5) AG18(0.5,-9.5) AG19(1.5,-9.5) AG20(2.5,-9.5) AG21(3.5,-9.5) AG22(4.5,-9.5) AG23(5.5,-9.5) AG24(6.5,-9.5) AG25(7.5,-9.5) AG26(8.5,-9.5) AG27(9.5,-9.5) AG28(10.5,-9.5) AG29(11.5,-9.5) AG30(12.5,-9.5) AG31(13.5,-9.5) AG32(14.5,-9.5) AG33(15.5,-9.5) AG34(16.5,-9.5) AH1(-16.5,-10.5) AH2(-15.5,-10.5) AH3(-14.5,-10.5) AH4(-13.5,-10.5) AH5(-12.5,-10.5) AH6(-11.5,-10.5) AH7(-10.5,-10.5) AH8(-9.5,-10.5) AH9(-8.5,-10.5) AH10(-7.5,-10.5) AH11(-6.5,-10.5) AH12(-5.5,-10.5) AH13(-4.5,-10.5) AH14(-3.5,-10.5) AH15(-2.5,-10.5) AH16(-1.5,-10.5) AH17(-0.5,-10.5) AH18(0.5,-10.5) AH19(1.5,-10.5) AH20(2.5,-10.5) AH21(3.5,-10.5) AH22(4.5,-10.5) AH23(5.5,-10.5) AH24(6.5,-10.5) AH25(7.5,-10.5) AH26(8.5,-10.5) AH27(9.5,-10.5) AH28(10.5,-10.5) AH29(11.5,-10.5) AH30(12.5,-10.5) AH31(13.5,-10.5) AH32(14.5,-10.5) AH33(15.5,-10.5) AH34(16.5,-10.5) AJ1(-16.5,-11.5) AJ2(-15.5,-11.5) AJ3(-14.5,-11.5) AJ4(-13.5,-11.5) AJ5(-12.5,-11.5) AJ6(-11.5,-11.5) AJ7(-10.5,-11.5) AJ8(-9.5,-11.5) AJ9(-8.5,-11.5) AJ10(-7.5,-11.5) AJ11(-6.5,-11.5) AJ12(-5.5,-11.5) AJ13(-4.5,-11.5) AJ14(-3.5,-11.5) AJ15(-2.5,-11.5) AJ16(-1.5,-11.5) AJ17(-0.5,-11.5) AJ18(0.5,-11.5) AJ19(1.5,-11.5) AJ20(2.5,-11.5) AJ21(3.5,-11.5) AJ22(4.5,-11.5) AJ23(5.5,-11.5) AJ24(6.5,-11.5) AJ25(7.5,-11.5) AJ26(8.5,-11.5) AJ27(9.5,-11.5) AJ28(10.5,-11.5) AJ29(11.5,-11.5) AJ30(12.5,-11.5) AJ31(13.5,-11.5) AJ32(14.5,-11.5) AJ33(15.5,-11.5) AJ34(16.5,-11.5) AK1(-16.5,-12.5) AK2(-15.5,-12.5) AK3(-14.5,-12.5) AK4(-13.5,-12.5) AK5(-12.5,-12.5) AK6(-11.5,-12.5) AK7(-10.5,-12.5) AK8(-9.5,-12.5) AK9(-8.5,-12.5) AK10(-7.5,-12.5) AK11(-6.5,-12.5) AK12(-5.5,-12.5) AK13(-4.5,-12.5) AK14(-3.5,-12.5) AK15(-2.5,-12.5) AK16(-1.5,-12.5) AK17(-0.5,-12.5) AK18(0.5,-12.5) AK19(1.5,-12.5) AK20(2.5,-12.5) AK21(3.5,-12.5) AK22(4.5,-12.5) AK23(5.5,-12.5) AK24(6.5,-12.5) AK25(7.5,-12.5) AK26(8.5,-12.5) AK27(9.5,-12.5) AK28(10.5,-12.5) AK29(11.5,-12.5) AK30(12.5,-12.5) AK31(13.5,-12.5) AK32(14.5,-12.5) AK33(15.5,-12.5) AK34(16.5,-12.5) AL1(-16.5,-13.5) AL2(-15.5,-13.5) AL3(-14.5,-13.5) AL4(-13.5,-13.5) AL5(-12.5,-13.5) AL6(-11.5,-13.5) AL7(-10.5,-13.5) AL8(-9.5,-13.5) AL9(-8.5,-13.5) AL10(-7.5,-13.5) AL11(-6.5,-13.5) AL12(-5.5,-13.5) AL13(-4.5,-13.5) AL14(-3.5,-13.5) AL15(-2.5,-13.5) AL16(-1.5,-13.5) AL17(-0.5,-13.5) AL18(0.5,-13.5) AL19(1.5,-13.5) AL20(2.5,-13.5) AL21(3.5,-13.5) AL22(4.5,-13.5) AL23(5.5,-13.5) AL24(6.5,-13.5) AL25(7.5,-13.5) AL26(8.5,-13.5) AL27(9.5,-13.5) AL28(10.5,-13.5) AL29(11.5,-13.5) AL30(12.5,-13.5) AL31(13.5,-13.5) AL32(14.5,-13.5) AL33(15.5,-13.5) AL34(16.5,-13.5) AM1(-16.5,-14.5) AM2(-15.5,-14.5) AM3(-14.5,-14.5) AM4(-13.5,-14.5) AM5(-12.5,-14.5) AM6(-11.5,-14.5) AM7(-10.5,-14.5) AM8(-9.5,-14.5) AM9(-8.5,-14.5) AM10(-7.5,-14.5) AM11(-6.5,-14.5) AM12(-5.5,-14.5) AM13(-4.5,-14.5) AM14(-3.5,-14.5) AM15(-2.5,-14.5) AM16(-1.5,-14.5) AM17(-0.5,-14.5) AM18(0.5,-14.5) AM19(1.5,-14.5) AM20(2.5,-14.5) AM21(3.5,-14.5) AM22(4.5,-14.5) AM23(5.5,-14.5) AM24(6.5,-14.5) AM25(7.5,-14.5) AM26(8.5,-14.5) AM27(9.5,-14.5) AM28(10.5,-14.5) AM29(11.5,-14.5) AM30(12.5,-14.5) AM31(13.5,-14.5) AM32(14.5,-14.5) AM33(15.5,-14.5) AM34(16.5,-14.5) AN1(-16.5,-15.5) AN2(-15.5,-15.5) AN3(-14.5,-15.5) AN4(-13.5,-15.5) AN5(-12.5,-15.5) AN6(-11.5,-15.5) AN7(-10.5,-15.5) AN8(-9.5,-15.5) AN9(-8.5,-15.5) AN10(-7.5,-15.5) AN11(-6.5,-15.5) AN12(-5.5,-15.5) AN13(-4.5,-15.5) AN14(-3.5,-15.5) AN15(-2.5,-15.5) AN16(-1.5,-15.5) AN17(-0.5,-15.5) AN18(0.5,-15.5) AN19(1.5,-15.5) AN20(2.5,-15.5) AN21(3.5,-15.5) AN22(4.5,-15.5) AN23(5.5,-15.5) AN24(6.5,-15.5) AN25(7.5,-15.5) AN26(8.5,-15.5) AN27(9.5,-15.5) AN28(10.5,-15.5) AN29(11.5,-15.5) AN30(12.5,-15.5) AN31(13.5,-15.5) AN32(14.5,-15.5) AN33(15.5,-15.5) AN34(16.5,-15.5) AP2(-15.5,-16.5) AP3(-14.5,-16.5) AP4(-13.5,-16.5) AP5(-12.5,-16.5) AP6(-11.5,-16.5) AP7(-10.5,-16.5) AP8(-9.5,-16.5) AP9(-8.5,-16.5) AP10(-7.5,-16.5) AP11(-6.5,-16.5) AP12(-5.5,-16.5) AP13(-4.5,-16.5) AP14(-3.5,-16.5) AP15(-2.5,-16.5) AP16(-1.5,-16.5) AP17(-0.5,-16.5) AP18(0.5,-16.5) AP19(1.5,-16.5) AP20(2.5,-16.5) AP21(3.5,-16.5) AP22(4.5,-16.5) AP23(5.5,-16.5) AP24(6.5,-16.5) AP25(7.5,-16.5) AP26(8.5,-16.5) AP27(9.5,-16.5) AP28(10.5,-16.5) AP29(11.5,-16.5) AP30(12.5,-16.5) AP31(13.5,-16.5) AP32(14.5,-16.5) AP33(15.5,-16.5) B1(-16.5,15.5) B2(-15.5,15.5) B3(-14.5,15.5) B4(-13.5,15.5) B5(-12.5,15.5) B6(-11.5,15.5) B7(-10.5,15.5) B8(-9.5,15.5) B9(-8.5,15.5) B10(-7.5,15.5) B11(-6.5,15.5) B12(-5.5,15.5) B13(-4.5,15.5) B14(-3.5,15.5) B15(-2.5,15.5) B16(-1.5,15.5) B17(-0.5,15.5) B18(0.5,15.5) B19(1.5,15.5) B20(2.5,15.5) B21(3.5,15.5) B22(4.5,15.5) B23(5.5,15.5) B24(6.5,15.5) B25(7.5,15.5) B26(8.5,15.5) B27(9.5,15.5) B28(10.5,15.5) B29(11.5,15.5) B30(12.5,15.5) B31(13.5,15.5) B32(14.5,15.5) B33(15.5,15.5) B34(16.5,15.5) C1(-16.5,14.5) C2(-15.5,14.5) C3(-14.5,14.5) C4(-13.5,14.5) C5(-12.5,14.5) C6(-11.5,14.5) C7(-10.5,14.5) C8(-9.5,14.5) C9(-8.5,14.5) C10(-7.5,14.5) C11(-6.5,14.5) C12(-5.5,14.5) C13(-4.5,14.5) C14(-3.5,14.5) C15(-2.5,14.5) C16(-1.5,14.5) C17(-0.5,14.5) C18(0.5,14.5) C19(1.5,14.5) C20(2.5,14.5) C21(3.5,14.5) C22(4.5,14.5) C23(5.5,14.5) C24(6.5,14.5) C25(7.5,14.5) C26(8.5,14.5) C27(9.5,14.5) C28(10.5,14.5) C29(11.5,14.5) C30(12.5,14.5) C31(13.5,14.5) C32(14.5,14.5) C33(15.5,14.5) C34(16.5,14.5) D1(-16.5,13.5) D2(-15.5,13.5) D3(-14.5,13.5) D4(-13.5,13.5) D5(-12.5,13.5) D6(-11.5,13.5) D7(-10.5,13.5) D8(-9.5,13.5) D9(-8.5,13.5) D10(-7.5,13.5) D11(-6.5,13.5) D12(-5.5,13.5) D13(-4.5,13.5) D14(-3.5,13.5) D15(-2.5,13.5) D16(-1.5,13.5) D17(-0.5,13.5) D18(0.5,13.5) D19(1.5,13.5) D20(2.5,13.5) D21(3.5,13.5) D22(4.5,13.5) D23(5.5,13.5) D24(6.5,13.5) D25(7.5,13.5) D26(8.5,13.5) D27(9.5,13.5) D28(10.5,13.5) D29(11.5,13.5) D30(12.5,13.5) D31(13.5,13.5) D32(14.5,13.5) D33(15.5,13.5) D34(16.5,13.5) E1(-16.5,12.5) E2(-15.5,12.5) E3(-14.5,12.5) E4(-13.5,12.5) E5(-12.5,12.5) E6(-11.5,12.5) E7(-10.5,12.5) E8(-9.5,12.5) E9(-8.5,12.5) E10(-7.5,12.5) E11(-6.5,12.5) E12(-5.5,12.5) E13(-4.5,12.5) E14(-3.5,12.5) E15(-2.5,12.5) E16(-1.5,12.5) E17(-0.5,12.5) E18(0.5,12.5) E19(1.5,12.5) E20(2.5,12.5) E21(3.5,12.5) E22(4.5,12.5) E23(5.5,12.5) E24(6.5,12.5) E25(7.5,12.5) E26(8.5,12.5) E27(9.5,12.5) E28(10.5,12.5) E29(11.5,12.5) E30(12.5,12.5) E31(13.5,12.5) E32(14.5,12.5) E33(15.5,12.5) E34(16.5,12.5) F1(-16.5,11.5) F2(-15.5,11.5) F3(-14.5,11.5) F4(-13.5,11.5) F5(-12.5,11.5) F6(-11.5,11.5) F7(-10.5,11.5) F8(-9.5,11.5) F9(-8.5,11.5) F10(-7.5,11.5) F11(-6.5,11.5) F12(-5.5,11.5) F13(-4.5,11.5) F14(-3.5,11.5) F15(-2.5,11.5) F16(-1.5,11.5) F17(-0.5,11.5) F18(0.5,11.5) F19(1.5,11.5) F20(2.5,11.5) F21(3.5,11.5) F22(4.5,11.5) F23(5.5,11.5) F24(6.5,11.5) F25(7.5,11.5) F26(8.5,11.5) F27(9.5,11.5) F28(10.5,11.5) F29(11.5,11.5) F30(12.5,11.5) F31(13.5,11.5) F32(14.5,11.5) F33(15.5,11.5) F34(16.5,11.5) G1(-16.5,10.5) G2(-15.5,10.5) G3(-14.5,10.5) G4(-13.5,10.5) G5(-12.5,10.5) G6(-11.5,10.5) G7(-10.5,10.5) G8(-9.5,10.5) G9(-8.5,10.5) G10(-7.5,10.5) G11(-6.5,10.5) G12(-5.5,10.5) G13(-4.5,10.5) G14(-3.5,10.5) G15(-2.5,10.5) G16(-1.5,10.5) G17(-0.5,10.5) G18(0.5,10.5) G19(1.5,10.5) G20(2.5,10.5) G21(3.5,10.5) G22(4.5,10.5) G23(5.5,10.5) G24(6.5,10.5) G25(7.5,10.5) G26(8.5,10.5) G27(9.5,10.5) G28(10.5,10.5) G29(11.5,10.5) G30(12.5,10.5) G31(13.5,10.5) G32(14.5,10.5) G33(15.5,10.5) G34(16.5,10.5) H1(-16.5,9.5) H2(-15.5,9.5) H3(-14.5,9.5) H4(-13.5,9.5) H5(-12.5,9.5) H6(-11.5,9.5) H7(-10.5,9.5) H8(-9.5,9.5) H9(-8.5,9.5) H10(-7.5,9.5) H11(-6.5,9.5) H12(-5.5,9.5) H13(-4.5,9.5) H14(-3.5,9.5) H15(-2.5,9.5) H16(-1.5,9.5) H17(-0.5,9.5) H18(0.5,9.5) H19(1.5,9.5) H20(2.5,9.5) H21(3.5,9.5) H22(4.5,9.5) H23(5.5,9.5) H24(6.5,9.5) H25(7.5,9.5) H26(8.5,9.5) H27(9.5,9.5) H28(10.5,9.5) H29(11.5,9.5) H30(12.5,9.5) H31(13.5,9.5) H32(14.5,9.5) H33(15.5,9.5) H34(16.5,9.5) J1(-16.5,8.5) J2(-15.5,8.5) J3(-14.5,8.5) J4(-13.5,8.5) J5(-12.5,8.5) J6(-11.5,8.5) J7(-10.5,8.5) J8(-9.5,8.5) J9(-8.5,8.5) J10(-7.5,8.5) J11(-6.5,8.5) J12(-5.5,8.5) J13(-4.5,8.5) J14(-3.5,8.5) J15(-2.5,8.5) J16(-1.5,8.5) J17(-0.5,8.5) J18(0.5,8.5) J19(1.5,8.5) J20(2.5,8.5) J21(3.5,8.5) J22(4.5,8.5) J23(5.5,8.5) J24(6.5,8.5) J25(7.5,8.5) J26(8.5,8.5) J27(9.5,8.5) J28(10.5,8.5) J29(11.5,8.5) J30(12.5,8.5) J31(13.5,8.5) J32(14.5,8.5) J33(15.5,8.5) J34(16.5,8.5) K1(-16.5,7.5) K2(-15.5,7.5) K3(-14.5,7.5) K4(-13.5,7.5) K5(-12.5,7.5) K6(-11.5,7.5) K7(-10.5,7.5) K8(-9.5,7.5) K9(-8.5,7.5) K10(-7.5,7.5) K11(-6.5,7.5) K12(-5.5,7.5) K13(-4.5,7.5) K14(-3.5,7.5) K15(-2.5,7.5) K16(-1.5,7.5) K17(-0.5,7.5) K18(0.5,7.5) K19(1.5,7.5) K20(2.5,7.5) K21(3.5,7.5) K22(4.5,7.5) K23(5.5,7.5) K24(6.5,7.5) K25(7.5,7.5) K26(8.5,7.5) K27(9.5,7.5) K28(10.5,7.5) K29(11.5,7.5) K30(12.5,7.5) K31(13.5,7.5) K32(14.5,7.5) K33(15.5,7.5) K34(16.5,7.5) L1(-16.5,6.5) L2(-15.5,6.5) L3(-14.5,6.5) L4(-13.5,6.5) L5(-12.5,6.5) L6(-11.5,6.5) L7(-10.5,6.5) L8(-9.5,6.5) L9(-8.5,6.5) L10(-7.5,6.5) L11(-6.5,6.5) L12(-5.5,6.5) L13(-4.5,6.5) L14(-3.5,6.5) L15(-2.5,6.5) L16(-1.5,6.5) L17(-0.5,6.5) L18(0.5,6.5) L19(1.5,6.5) L20(2.5,6.5) L21(3.5,6.5) L22(4.5,6.5) L23(5.5,6.5) L24(6.5,6.5) L25(7.5,6.5) L26(8.5,6.5) L27(9.5,6.5) L28(10.5,6.5) L29(11.5,6.5) L30(12.5,6.5) L31(13.5,6.5) L32(14.5,6.5) L33(15.5,6.5) L34(16.5,6.5) M1(-16.5,5.5) M2(-15.5,5.5) M3(-14.5,5.5) M4(-13.5,5.5) M5(-12.5,5.5) M6(-11.5,5.5) M7(-10.5,5.5) M8(-9.5,5.5) M9(-8.5,5.5) M10(-7.5,5.5) M11(-6.5,5.5) M12(-5.5,5.5) M13(-4.5,5.5) M14(-3.5,5.5) M15(-2.5,5.5) M16(-1.5,5.5) M17(-0.5,5.5) M18(0.5,5.5) M19(1.5,5.5) M20(2.5,5.5) M21(3.5,5.5) M22(4.5,5.5) M23(5.5,5.5) M24(6.5,5.5) M25(7.5,5.5) M26(8.5,5.5) M27(9.5,5.5) M28(10.5,5.5) M29(11.5,5.5) M30(12.5,5.5) M31(13.5,5.5) M32(14.5,5.5) M33(15.5,5.5) M34(16.5,5.5) N1(-16.5,4.5) N2(-15.5,4.5) N3(-14.5,4.5) N4(-13.5,4.5) N5(-12.5,4.5) N6(-11.5,4.5) N7(-10.5,4.5) N8(-9.5,4.5) N9(-8.5,4.5) N10(-7.5,4.5) N11(-6.5,4.5) N12(-5.5,4.5) N13(-4.5,4.5) N14(-3.5,4.5) N15(-2.5,4.5) N16(-1.5,4.5) N17(-0.5,4.5) N18(0.5,4.5) N19(1.5,4.5) N20(2.5,4.5) N21(3.5,4.5) N22(4.5,4.5) N23(5.5,4.5) N24(6.5,4.5) N25(7.5,4.5) N26(8.5,4.5) N27(9.5,4.5) N28(10.5,4.5) N29(11.5,4.5) N30(12.5,4.5) N31(13.5,4.5) N32(14.5,4.5) N33(15.5,4.5) N34(16.5,4.5) P1(-16.5,3.5) P2(-15.5,3.5) P3(-14.5,3.5) P4(-13.5,3.5) P5(-12.5,3.5) P6(-11.5,3.5) P7(-10.5,3.5) P8(-9.5,3.5) P9(-8.5,3.5) P10(-7.5,3.5) P11(-6.5,3.5) P12(-5.5,3.5) P13(-4.5,3.5) P15(-2.5,3.5) P16(-1.5,3.5) P17(-0.5,3.5) P18(0.5,3.5) P19(1.5,3.5) P20(2.5,3.5) P22(4.5,3.5) P23(5.5,3.5) P24(6.5,3.5) P25(7.5,3.5) P26(8.5,3.5) P27(9.5,3.5) P28(10.5,3.5) P29(11.5,3.5) P30(12.5,3.5) P31(13.5,3.5) P32(14.5,3.5) P33(15.5,3.5) P34(16.5,3.5) R1(-16.5,2.5) R2(-15.5,2.5) R3(-14.5,2.5) R4(-13.5,2.5) R5(-12.5,2.5) R6(-11.5,2.5) R7(-10.5,2.5) R8(-9.5,2.5) R9(-8.5,2.5) R10(-7.5,2.5) R11(-6.5,2.5) R12(-5.5,2.5) R13(-4.5,2.5) R14(-3.5,2.5) R15(-2.5,2.5) R16(-1.5,2.5) R17(-0.5,2.5) R18(0.5,2.5) R19(1.5,2.5) R20(2.5,2.5) R21(3.5,2.5) R22(4.5,2.5) R23(5.5,2.5) R24(6.5,2.5) R25(7.5,2.5) R26(8.5,2.5) R27(9.5,2.5) R28(10.5,2.5) R29(11.5,2.5) R30(12.5,2.5) R31(13.5,2.5) R32(14.5,2.5) R33(15.5,2.5) R34(16.5,2.5) T1(-16.5,1.5) T2(-15.5,1.5) T3(-14.5,1.5) T4(-13.5,1.5) T5(-12.5,1.5) T6(-11.5,1.5) T7(-10.5,1.5) T8(-9.5,1.5) T9(-8.5,1.5) T10(-7.5,1.5) T11(-6.5,1.5) T12(-5.5,1.5) T13(-4.5,1.5) T14(-3.5,1.5) T15(-2.5,1.5) T16(-1.5,1.5) T17(-0.5,1.5) T18(0.5,1.5) T19(1.5,1.5) T20(2.5,1.5) T21(3.5,1.5) T22(4.5,1.5) T23(5.5,1.5) T24(6.5,1.5) T25(7.5,1.5) T26(8.5,1.5) T27(9.5,1.5) T28(10.5,1.5) T29(11.5,1.5) T30(12.5,1.5) T31(13.5,1.5) T32(14.5,1.5) T33(15.5,1.5) T34(16.5,1.5) U1(-16.5,0.5) U2(-15.5,0.5) U3(-14.5,0.5) U4(-13.5,0.5) U5(-12.5,0.5) U6(-11.5,0.5) U7(-10.5,0.5) U8(-9.5,0.5) U9(-8.5,0.5) U10(-7.5,0.5) U11(-6.5,0.5) U12(-5.5,0.5) U13(-4.5,0.5) U14(-3.5,0.5) U15(-2.5,0.5) U16(-1.5,0.5) U17(-0.5,0.5) U18(0.5,0.5) U19(1.5,0.5) U20(2.5,0.5) U21(3.5,0.5) U22(4.5,0.5) U23(5.5,0.5) U24(6.5,0.5) U25(7.5,0.5) U26(8.5,0.5) U27(9.5,0.5) U28(10.5,0.5) U29(11.5,0.5) U30(12.5,0.5) U31(13.5,0.5) U32(14.5,0.5) U33(15.5,0.5) U34(16.5,0.5) V1(-16.5,-0.5) V2(-15.5,-0.5) V3(-14.5,-0.5) V4(-13.5,-0.5) V5(-12.5,-0.5) V6(-11.5,-0.5) V7(-10.5,-0.5) V8(-9.5,-0.5) V9(-8.5,-0.5) V10(-7.5,-0.5) V11(-6.5,-0.5) V12(-5.5,-0.5) V13(-4.5,-0.5) V14(-3.5,-0.5) V15(-2.5,-0.5) V16(-1.5,-0.5) V17(-0.5,-0.5) V18(0.5,-0.5) V19(1.5,-0.5) V20(2.5,-0.5) V21(3.5,-0.5) V22(4.5,-0.5) V23(5.5,-0.5) V24(6.5,-0.5) V25(7.5,-0.5) V26(8.5,-0.5) V27(9.5,-0.5) V28(10.5,-0.5) V29(11.5,-0.5) V30(12.5,-0.5) V31(13.5,-0.5) V32(14.5,-0.5) V33(15.5,-0.5) V34(16.5,-0.5) W1(-16.5,-1.5) W2(-15.5,-1.5) W3(-14.5,-1.5) W4(-13.5,-1.5) W5(-12.5,-1.5) W6(-11.5,-1.5) W7(-10.5,-1.5) W8(-9.5,-1.5) W9(-8.5,-1.5) W10(-7.5,-1.5) W11(-6.5,-1.5) W12(-5.5,-1.5) W13(-4.5,-1.5) W14(-3.5,-1.5) W15(-2.5,-1.5) W16(-1.5,-1.5) W17(-0.5,-1.5) W18(0.5,-1.5) W19(1.5,-1.5) W20(2.5,-1.5) W21(3.5,-1.5) W22(4.5,-1.5) W23(5.5,-1.5) W24(6.5,-1.5) W25(7.5,-1.5) W26(8.5,-1.5) W27(9.5,-1.5) W28(10.5,-1.5) W29(11.5,-1.5) W30(12.5,-1.5) W31(13.5,-1.5) W32(14.5,-1.5) W33(15.5,-1.5) W34(16.5,-1.5) Y1(-16.5,-2.5) Y2(-15.5,-2.5) Y3(-14.5,-2.5) Y4(-13.5,-2.5) Y5(-12.5,-2.5) Y6(-11.5,-2.5) Y7(-10.5,-2.5) Y8(-9.5,-2.5) Y9(-8.5,-2.5) Y10(-7.5,-2.5) Y11(-6.5,-2.5) Y12(-5.5,-2.5) Y13(-4.5,-2.5) Y14(-3.5,-2.5) Y15(-2.5,-2.5) Y16(-1.5,-2.5) Y17(-0.5,-2.5) Y18(0.5,-2.5) Y19(1.5,-2.5) Y20(2.5,-2.5) Y21(3.5,-2.5) Y22(4.5,-2.5) Y23(5.5,-2.5) Y24(6.5,-2.5) Y25(7.5,-2.5) Y26(8.5,-2.5) Y27(9.5,-2.5) Y28(10.5,-2.5) Y29(11.5,-2.5) Y30(12.5,-2.5) Y31(13.5,-2.5) Y32(14.5,-2.5) Y33(15.5,-2.5) Y34(16.5,-2.5)
CAT811
  rect 1.499x1 smd: 1(0,0) 2(0,2) 3(-2.5,2) 4(-2.5,0)
CON-BNC-S-T
  round 2.54 hole 1.524: 1(0,0) 2(2.54,-2.54) 3(2.54,2.54) 4(-2.54,2.54) 5(-2.54,-2.54)
CY7C68013
  rect 2.54x0.254 smd: 1(0,0) 2(0,-0.635) 3(0,-1.27) 4(0,-1.905) 5(0,-2.54) 6(0,-3.175) 7(0,-3.81) 8(0,-4.445) 9(0,-5.08) 10(0,-5.715) 11(0,-6.35) 12(0,-6.985) 13(0,-7.62) 14(0,-8.255) 15(0,-8.89) 16(0,-9.525) 17(0,-10.16) 18(0,-10.795) 19(0,-11.43) 20(0,-12.065) 21(0,-12.7) 22(0,-13.335) 23(0,-13.97) 24(0,-14.605) 25(0,-15.24) 26(0,-15.875) 27(0,-16.51) 28(0,-17.145) 29(10.033,-17.145) 30(10.033,-16.51) 31(10.033,-15.875) 32(10.033,-15.24) 33(10.033,-14.605) 34(10.033,-13.97) 35(10.033,-13.335) 36(10.033,-12.7) 37(10.033,-12.065) 38(10.033,-11.43) 39(10.033,-10.795) 40(10.033,-10.16) 41(10.033,-9.525) 42(10.033,-8.89) 43(10.033,-8.255) 44(10.033,-7.62) 45(10.033,-6.985) 46(10.033,-6.35) 47(10.033,-5.715) 48(10.033,-5.08) 49(10.033,-4.445) 50(10.033,-3.81) 51(10.033,-3.175) 52(10.033,-2.54) 53(10.033,-1.905) 54(10.033,-1.27) 55(10.033,-0.635) 56(10.033,0)
DIP8
  rect 0.76x1.3 smd: 1(0,0) 2(1.27,0) 3(2.54,0) 4(3.81,0) 5(3.81,6.2) 6(2.54,6.2) 7(1.27,6.2) 8(0,6.2)
ETC1-1-13TR
  rect 0.762x1.397 smd: 1(0,0) 2(1.27,0) 3(2.54,0) 4(2.54,-3.43) 5(1.27,-3.43) 6(0,-3.43)
HEAD1X6
  rect 1.397x1.397 hole 1.016: 1(0,0)
  round 1.397 hole 1.016: 2(2.54,0) 3(5.08,0) 4(7.62,0) 5(10.16,0) 6(12.7,0)
HEAD-14P
  rect 1.397x1.397 hole 1.016: 1(-7.62,-1.27)
  round 1.397 hole 1.016: 2(-7.62,1.27) 3(-5.08,-1.27) 4(-5.08,1.27) 5(-2.54,-1.27) 6(-2.54,1.27) 7(0,-1.27) 8(0,1.27) 9(2.54,-1.27) 10(2.54,1.27) 11(5.08,-1.27) 12(5.08,1.27) 13(7.62,-1.27) 14(7.62,1.27)
LMX2581
  rect 0.25x0.6 smd: 1(1.75,2.4) 2(1.25,2.4) 3(0.75,2.4) 4(0.25,2.4) 5(-0.25,2.4) 6(-0.75,2.4) 7(-1.25,2.4) 8(-1.75,2.4) 17(-1.75,-2.4) 18(-1.25,-2.4) 19(-0.75,-2.4) 20(-0.25,-2.4) 21(0.25,-2.4) 22(0.75,-2.4) 23(1.25,-2.4) 24(1.75,-2.4)
  rect 0.6x0.25 smd: 9(-2.4,1.75) 10(-2.4,1.25) 11(-2.4,0.75) 12(-2.4,0.25) 13(-2.4,-0.25) 14(-2.4,-0.75) 15(-2.4,-1.25) 16(-2.4,-1.75) 25(2.4,-1.75) 26(2.4,-1.25) 27(2.4,-0.75) 28(2.4,-0.25) 29(2.4,0.25) 30(2.4,0.75) 31(2.4,1.25) 32(2.4,1.75)
  rect 3.1x3.1 smd: EP(0,0)
PQFP_128
  rect 1.6x0.3 smd: 1(8.25,-9.25) 2(8.25,-8.75) 3(8.25,-8.25) 4(8.25,-7.75) 5(8.25,-7.25) 6(8.25,-6.75) 7(8.25,-6.25) 8(8.25,-5.75) 9(8.25,-5.25) 10(8.25,-4.75) 11(8.25,-4.25) 12(8.25,-3.75) 13(8.25,-3.25) 14(8.25,-2.75) 15(8.25,-2.25) 16(8.25,-1.75) 17(8.25,-1.25) 18(8.25,-0.75) 19(8.25,-0.25) 20(8.25,0.25) 21(8.25,0.75) 22(8.25,1.25) 23(8.25,1.75) 24(8.25,2.25) 25(8.25,2.75) 26(8.25,3.25) 27(8.25,3.75) 28(8.25,4.25) 29(8.25,4.75) 30(8.25,5.25) 31(8.25,5.75) 32(8.25,6.25) 33(8.25,6.75) 34(8.25,7.25) 35(8.25,7.75) 36(8.25,8.25) 37(8.25,8.75) 38(8.25,9.25) 65(-8.25,9.25) 66(-8.25,8.75) 67(-8.25,8.25) 68(-8.25,7.75) 69(-8.25,7.25) 70(-8.25,6.75) 71(-8.25,6.25) 72(-8.25,5.75) 73(-8.25,5.25) 74(-8.25,4.75) 75(-8.25,4.25) 76(-8.25,3.75) 77(-8.25,3.25) 78(-8.25,2.75) 79(-8.25,2.25) 80(-8.25,1.75) 81(-8.25,1.25) 82(-8.25,0.75) 83(-8.25,0.25) 84(-8.25,-0.25) 85(-8.25,-0.75) 86(-8.25,-1.25) 87(-8.25,-1.75) 88(-8.25,-2.25) 89(-8.25,-2.75) 90(-8.25,-3.25) 91(-8.25,-3.75) 92(-8.25,-4.25) 93(-8.25,-4.75) 94(-8.25,-5.25) 95(-8.25,-5.75) 96(-8.25,-6.25) 97(-8.25,-6.75) 98(-8.25,-7.25) 99(-8.25,-7.75) 100(-8.25,-8.25) 101(-8.25,-8.75) 102(-8.25,-9.25)
  rect 0.3x1.6 smd: 39(6.25,11.25) 40(5.75,11.25) 41(5.25,11.25) 42(4.75,11.25) 43(4.25,11.25) 44(3.75,11.25) 45(3.25,11.25) 46(2.75,11.25) 47(2.25,11.25) 48(1.75,11.25) 49(1.25,11.25) 50(0.75,11.25) 51(0.25,11.25) 52(-0.25,11.25) 53(-0.75,11.25) 54(-1.25,11.25) 55(-1.75,11.25) 56(-2.25,11.25) 57(-2.75,11.25) 58(-3.25,11.25) 59(-3.75,11.25) 60(-4.25,11.25) 61(-4.75,11.25) 62(-5.25,11.25) 63(-5.75,11.25) 64(-6.25,11.25) 103(-6.25,-11.25) 104(-5.75,-11.25) 105(-5.25,-11.25) 106(-4.75,-11.25) 107(-4.25,-11.25) 108(-3.75,-11.25) 109(-3.25,-11.25) 110(-2.75,-11.25) 111(-2.25,-11.25) 112(-1.75,-11.25) 113(-1.25,-11.25) 114(-0.75,-11.25) 115(-0.25,-11.25) 116(0.25,-11.25) 117(0.75,-11.25) 118(1.25,-11.25) 119(1.75,-11.25) 120(2.25,-11.25) 121(2.75,-11.25) 122(3.25,-11.25) 123(3.75,-11.25) 124(4.25,-11.25) 125(4.75,-11.25) 126(5.25,-11.25) 127(5.75,-11.25) 128(6.25,-11.25)
PTH08221W
  round 2 hole 1.5: 1(0,0) 2(15.89,3.17) 3(15.89,6.34) 4(15.89,15.86) 5(15.89,19.03) 6(12.72,19.03) 7(9.55,19.03) 8(6.38,19.03) 9(3.21,19.03) 10(0.04,19.03) 11(0,3.17)
PW_2P
  round 2.286 hole 1.524: 1(0,0) 2(5.08,0)
QFN68_69
  rect 0.2x1.05 smd: 1(3.2,4) 2(2.8,4) 3(2.4,4) 4(2,4) 5(1.6,4) 6(1.2,4) 7(0.8,4) 8(0.4,4) 9(0,4) 10(-0.4,4) 11(-0.8,4) 12(-1.2,4) 13(-1.6,4) 14(-2,4) 15(-2.4,4) 16(-2.8,4) 17(-3.2,4) 35(-3.2,-4) 36(-2.8,-4) 37(-2.4,-4) 38(-2,-4) 39(-1.6,-4) 40(-1.2,-4) 41(-0.8,-4) 42(-0.4,-4) 43(0,-4) 44(0.4,-4) 45(0.8,-4) 46(1.2,-4) 47(1.6,-4) 48(2,-4) 49(2.4,-4) 50(2.8,-4) 51(3.2,-4)
  rect 1.05x0.2 smd: 18(-4,3.2) 19(-4,2.8) 20(-4,2.4) 21(-4,2) 22(-4,1.6) 23(-4,1.2) 24(-4,0.8) 25(-4,0.4) 26(-4,0) 27(-4,-0.4) 28(-4,-0.8) 29(-4,-1.2) 30(-4,-1.6) 31(-4,-2) 32(-4,-2.4) 33(-4,-2.8) 34(-4,-3.2) 52(4,-3.2) 53(4,-2.8) 54(4,-2.4) 55(4,-2) 56(4,-1.6) 57(4,-1.2) 58(4,-0.8) 59(4,-0.4) 60(4,0) 61(4,0.4) 62(4,0.8) 63(4,1.2) 64(4,1.6) 65(4,2) 66(4,2.4) 67(4,2.8) 68(4,3.2)
  custom 4x4 smd: EP(0,0)
QFN_20
  rect 0.35x1.5 smd: 1(1.3,2.65) 2(0.65,2.65) 3(0,2.65) 4(-0.65,2.65) 5(-1.3,2.65) 11(-1.3,-2.65) 12(-0.65,-2.65) 13(0,-2.65) 14(0.65,-2.65) 15(1.3,-2.65)
  rect 1.5x0.35 smd: 6(-2.65,1.3) 7(-2.65,0.65) 8(-2.65,0) 9(-2.65,-0.65) 10(-2.65,-1.3) 16(2.65,-1.3) 17(2.65,-0.65) 18(2.65,0) 19(2.65,0.65) 20(2.65,1.3)
  rect 3x3 smd: T(0,0)
RJ45_HALO
  round 3.1 hole 3.25 unplated: (-0.005,-8.89) (11.425,-8.89)
  rect 1.524x1.524 hole 0.914: 1(0,0)
  round 1.524 hole 0.889: 2(1.27,-2.54) 3(2.54,0) 4(3.81,-2.54) 5(5.08,0) 6(6.35,-2.54) 7(7.62,0) 8(8.89,-2.54) 9(10.16,0) 10(11.43,-2.54)
  round 2.5 hole 1.6: SH1(-2.035,-5.84) SH2(13.455,-5.84)
RST_4P
  round 1.676 hole 1.067: 1(0,0) 2(4.5,0) 3(4.5,6.5) 4(0,6.5)
SC0402
  rect 0.635x0.508 smd: 1(-0.508,0) 2(0.508,0)
SC0603
  rect 0.813x0.889 smd: 1(-0.762,0) 2(0.762,0)
SC0805
  rect 1.143x1.27 smd: 1(-0.889,0) 2(0.889,0)
SC1210
  rect 1.397x2.413 smd: 1(-1.397,0) 2(1.397,0)
SC3528
  rect 2.134x2.134 smd: 1(-1.75,0) 2(1.75,0)
SC7343
  rect 2.88x2.88 smd: 1(-3.4,0) 2(3.4,0)
SR0603
  rect 0.813x0.889 smd: 1(-0.762,0) 2(0.762,0)
SR0805
  rect 1.016x1.143 smd: 1(-1.016,0) 2(1.016,0)
TSOP48
  rect 1x0.22 smd: 1(-9.7,5.8) 2(-9.7,5.3) 3(-9.7,4.8) 4(-9.7,4.3) 5(-9.7,3.8) 6(-9.7,3.3) 7(-9.7,2.8) 8(-9.7,2.3) 9(-9.7,1.8) 10(-9.7,1.3) 11(-9.7,0.8) 12(-9.7,0.3) 13(-9.7,-0.2) 14(-9.7,-0.7) 15(-9.7,-1.2) 16(-9.7,-1.7) 17(-9.7,-2.2) 18(-9.7,-2.7) 19(-9.7,-3.2) 20(-9.7,-3.7) 21(-9.7,-4.2) 22(-9.7,-4.7) 23(-9.7,-5.2) 24(-9.7,-5.7) 25(10.1,-5.7) 26(10.1,-5.2) 27(10.1,-4.7) 28(10.1,-4.2) 29(10.1,-3.7) 30(10.1,-3.2) 31(10.1,-2.7) 32(10.1,-2.2) 33(10.1,-1.7) 34(10.1,-1.2) 35(10.1,-0.7) 36(10.1,-0.2) 37(10.1,0.3) 38(10.1,0.8) 39(10.1,1.3) 40(10.1,1.8) 41(10.1,2.3) 42(10.1,2.8) 43(10.1,3.3) 44(10.1,3.8) 45(10.1,4.3) 46(10.1,4.8) 47(10.1,5.3) 48(10.1,5.8)
unnamed
  round 3.6 hole 3.6 unplated: (5,115) (5,5) (100,115) (100,5) (195,115) (195,5)
USBSKT
  round 1.524 hole 0.94: 1(0,0) 2(2.5,0) 3(4.5,0) 4(7,0)
  round 3.048 hole 2.413: 5(-3.07,-2.7) 6(10.07,-2.7)
XO75
  rect 1.8x2 smd: 1(-2.54,-2) 2(2.54,-2) 3(2.54,2) 4(-2.54,2)
XTAL2-200A
  round 1.27 hole 0.813: 1(-2.54,0) 2(2.54,0)

## Nets
1V8: C94.1 C95.1 C96.2 C131.1 C132.1 C133.1 C134.1 R16.2 U13.1(OUT1) U13.18(OUT2) U13.19(OUT3) U13.20(OUT4) U16.4(VCCINT_4) U16.15(VCCINT_15) U16.34(VCCINT_34)
2V5: C313.2 C314.2 C315.2 C316.2 C317.2 C318.2 C319.1 C320.2 L3.2 R37.1 R40.1 R49.2 R50.2 R51.2 R52.2 R53.2 R54.2 U3.AA10(VCCAUX_5) U3.AA12(VCCO_12_7) U3.AA22(VCCO_11_0) U3.AB9(VCCO_12_6) U3.AB27(VCCAUX_23) U3.AB29(VCCO_11_3) U3.AC6(VCCO_12_4) U3.AC24(VCCAUX_17) U3.AC26(VCCO_11_2) U3.AD3(VCCO_12_2) U3.AD11(VCCAUX_7) U3.AD33(VCCO_11_7) U3.AE30(VCCO_11_4) U3.AF7(VCCO_12_5) U3.AF25(VCCAUX_19) U3.AF27(VCCO_7_5) U3.AG4(VCCO_12_3) U3.AG12(VCCAUX_8) U3.AG24(VCCO_7_2) U3.AG34(VCCO_11_8) U3.AH1(VCCO_12_0) U3.AH9(VCCAUX_3) U3.AH31(VCCO_11_5) U3.AJ16(VCCAUX_10) U3.AJ26(VCCAUX_22) U3.AJ28(VCCO_7_6) U3.AK25(VCCO_7_3) U3.AL2(VCCO_12_1) U3.AL22(VCCO_7_0) U3.AL32(VCCO_11_6) U3.AM29(VCCO_7_7) U3.AN26(VCCO_7_4) U3.AP23(VCCO_7_1) U3.AP33(VCCO_7_8) U3.D3(VCCO_10_2) U3.D33(VCCO_9_7) U3.F9(VCCAUX_1) U3.F17(VCCO_3_0) U3.F19(VCCAUX_13) U3.G4(VCCO_10_3) U3.G26(VCCAUX_20) U3.G34(VCCO_9_8) U3.H1(VCCO_10_0) U3.H23(VCCAUX_15) U3.H31(VCCO_9_5) U3.J10(VCCAUX_4) U3.J18(VCCO_3_1) U3.J28(VCCO_9_3) U3.K5(VCCO_10_4) U3.L2(VCCO_10_1) U3.L24(VCCAUX_16) U3.L32(VCCO_9_6) U3.M9(VCCO_10_6) U3.M11(VCCAUX_6) U3.M29(VCCO_9_4) U3.N6(VCCO_10_5) U3.N8(VCCAUX_0) U3.N26(VCCO_9_2) U3.P13(VCCO_10_8) U3.P23(VCCO_9_1) U3.P25(VCCAUX_18) U3.R10(VCCO_10_7) U3.R18(VCCAUX_12) U3.R20(VCCO_9_0) U3.T9(VCCAUX_2) U3.U16(VCCAUX_9) U3.V19(VCCAUX_14) U3.W26(VCCAUX_21) U3.Y15(VCCO_12_8) U3.Y17(VCCAUX_11) U3.Y25(VCCO_11_1) U19.5(VDDO5) U19.11(VDDO4) U19.30(VDDO3) U19.34(VDDO1) U19.71(VDDO0) U19.73(VDDOH0) U19.80(CFG5) U19.81(CFG4) U19.82(CFG3) U19.86(CFG2) U19.89(VDDOH2) U19.97(VDDOH1) U19.122(VDDO2)
2V5_REF: C80.1 C81.1 C82.2 R13.2 U11.1(OUT1) U11.18(OUT2) U11.19(OUT3) U11.20(OUT4)
3V3: C74.2 C75.2 C84.2 C85.2 C86.2 C98.2 C99.2 C100.2 C104.1 C105.1 C106.1 C107.2 C125.1 C126.1 C127.1 C128.1 C129.1 C130.1 C135.2 C299.1 C300.1 C301.1 C302.1 C303.1 C304.1 C305.1 C306.1 C307.1 J2.2 JP3.1 L1.1 L7.1 R19.2 R20.2 R24.1 R26.1 R29.2 R31.2 R35.2 R89.2 R90.1 R91.1 U10.2(VS) U10.3(NSLEEP) U11.5(IN1) U11.6(IN2) U11.7(IN3) U11.8(IN4) U11.10(BIAS) U11.11(EN) U13.5(IN1) U13.6(IN2) U13.7(IN3) U13.8(IN4) U13.10(BIAS) U13.11(EN) U14.5(VO) U14.6(+SENSE) U16.8(VCCO_8) U16.24(VCCJ) U16.30(VCCO_30) U16.38(VCCO_38) U16.45(VCCO_45) U17.4(VCC) U18.4(VCC) U21.4(VCC) U22.4(VCC) U24.4(VCC) U25.4(VCC) U30.6(VCC_6) U30.18(VCC_18) U30.24(VCC_24) U30.34(VCC_34) U30.39(VCC_39) U30.50(VCC_50)
3V3_F: C276.2 C277.2 C278.2 C279.2 C280.2 JP3.2 L5.1 R68.1 R69.1 R71.1 R72.1 U3.A2(VCCO_6_0) U3.A12(VCCO_6_7) U3.A22(VCCO_5_0) U3.A32(VCCO_5_8) U3.AB19(VCCO_2_4) U3.AC16(VCCO_2_2) U3.AE20(VCCO_2_6) U3.AG14(VCCO_2_0) U3.AH21(VCCO_2_7) U3.AK15(VCCO_2_1) U3.AM19(VCCO_2_5) U3.AN16(VCCO_2_3) U3.B9(VCCO_6_4) U3.B29(VCCO_5_6) U3.C6(VCCO_6_1) U3.C26(VCCO_5_4) U3.D13(VCCO_6_8) U3.D23(VCCO_5_1) U3.E10(VCCO_6_5) U3.E30(VCCO_5_7) U3.F7(VCCO_6_2) U3.F27(VCCO_5_5) U3.G24(VCCO_5_2) U3.H11(VCCO_6_6) U3.J8(VCCO_6_3) U3.K25(VCCO_5_3) U3.T17(VCCO_0_1) U3.U14(VCCO_0_0) U3.V21(VCCO_0_3) U3.W18(VCCO_0_2)
5V: U29.1(VCC)
+1VCVDD: C8.2 C9.2 C10.2 C11.2 C28.2 C29.2 C30.2 C31.2 U1.1(CVDD1) U1.67(CVDD_67) U1.68(CVDD_68) U2.1(CVDD1) U2.67(CVDD_67) U2.68(CVDD_68)
+2V5AVDD: C4.2 C5.2 C12.2 C13.2 C14.2 C15.2 C16.2 C33.2 C34.2 C35.2 C36.2 C37.2 C38.2 U1.45(AVDD_45) U1.55(AVDD_55) U1.56(AVDD_56) U1.57(AVDD_57) U1.58(AVDD_58) U1.61(AVDD_61) U1.62(AVDD_62) U1.65(AVDD_65) U1.66(AVDD_66) U2.45(AVDD_45) U2.55(AVDD_55) U2.56(AVDD_56) U2.57(AVDD_57) U2.58(AVDD_58) U2.61(AVDD_61) U2.62(AVDD_62) U2.65(AVDD_65) U2.66(AVDD_66)
+2V5DRVDD: C19.2 C20.2 C21.2 C42.2 C43.2 C44.2 U1.18(DRVDD) U2.18(DRVDD)
+3V3PLL: C246.1 C247.2 C251.2 C268.2 C271.2 C274.2 C275.2 C281.2 C282.2 C283.2 C284.2 C285.2 C286.2 C287.2 C288.2 C289.2 L4.2 L5.2 R81.2 R82.1 R87.2 R88.1 U28.6(VCCCP) U28.10(VCCPL) U28.17(VCCVCO) U28.28(VCCDIG) U28.32(VCCFRAC)
DVDD1: C6.1 C17.1 C18.1 U1.5(DVDD_5) U1.43(DVDD_43)
DVDD2: C40.1 C41.1 C45.1 U2.5(DVDD_5) U2.43(DVDD_43)
DVSS1: C6.2 C17.2 C18.2 U1.4(DVSS_4) U1.44(DVSS_44)
DVSS2: C40.2 C41.2 C45.2 U2.4(DVSS_4) U2.44(DVSS_44)
